# Altium PCB ISL6236A DEMO_PCB_V1I1.PcbDoc
Units mm, origin at the board's own origin, x right, y up, seen from the top; angles counter-clockwise.
Board outline 50 x 50 mm, 6 copper layers (L1, L2, L3, L4, L5, L6), stack 0.816 mm thick; 41 components, 27 nets, 119 pads, 95 vias.
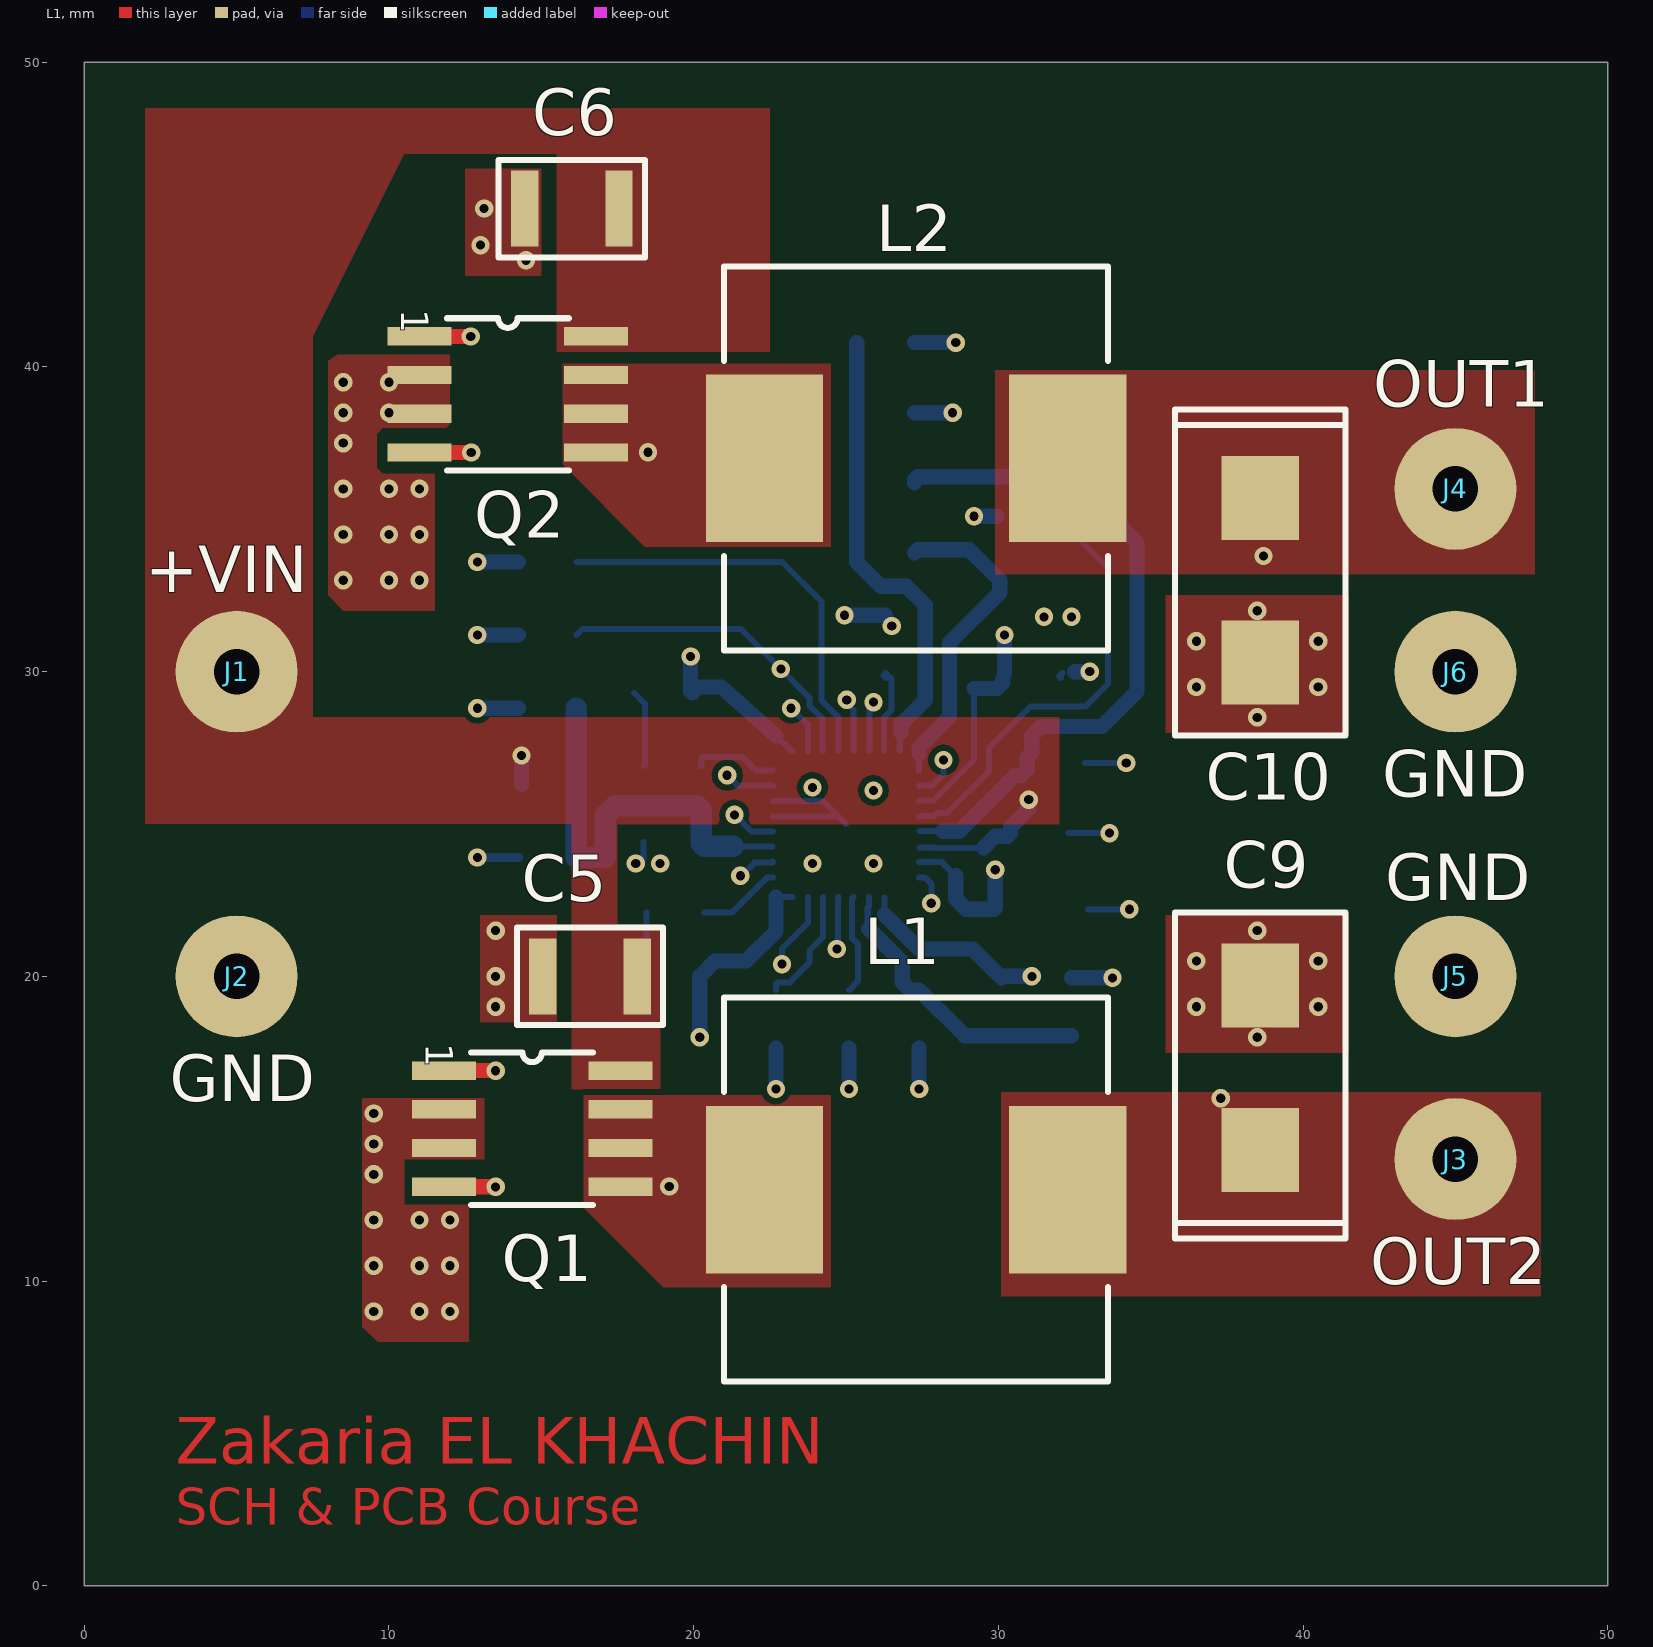
[diagram p0: L1 view]
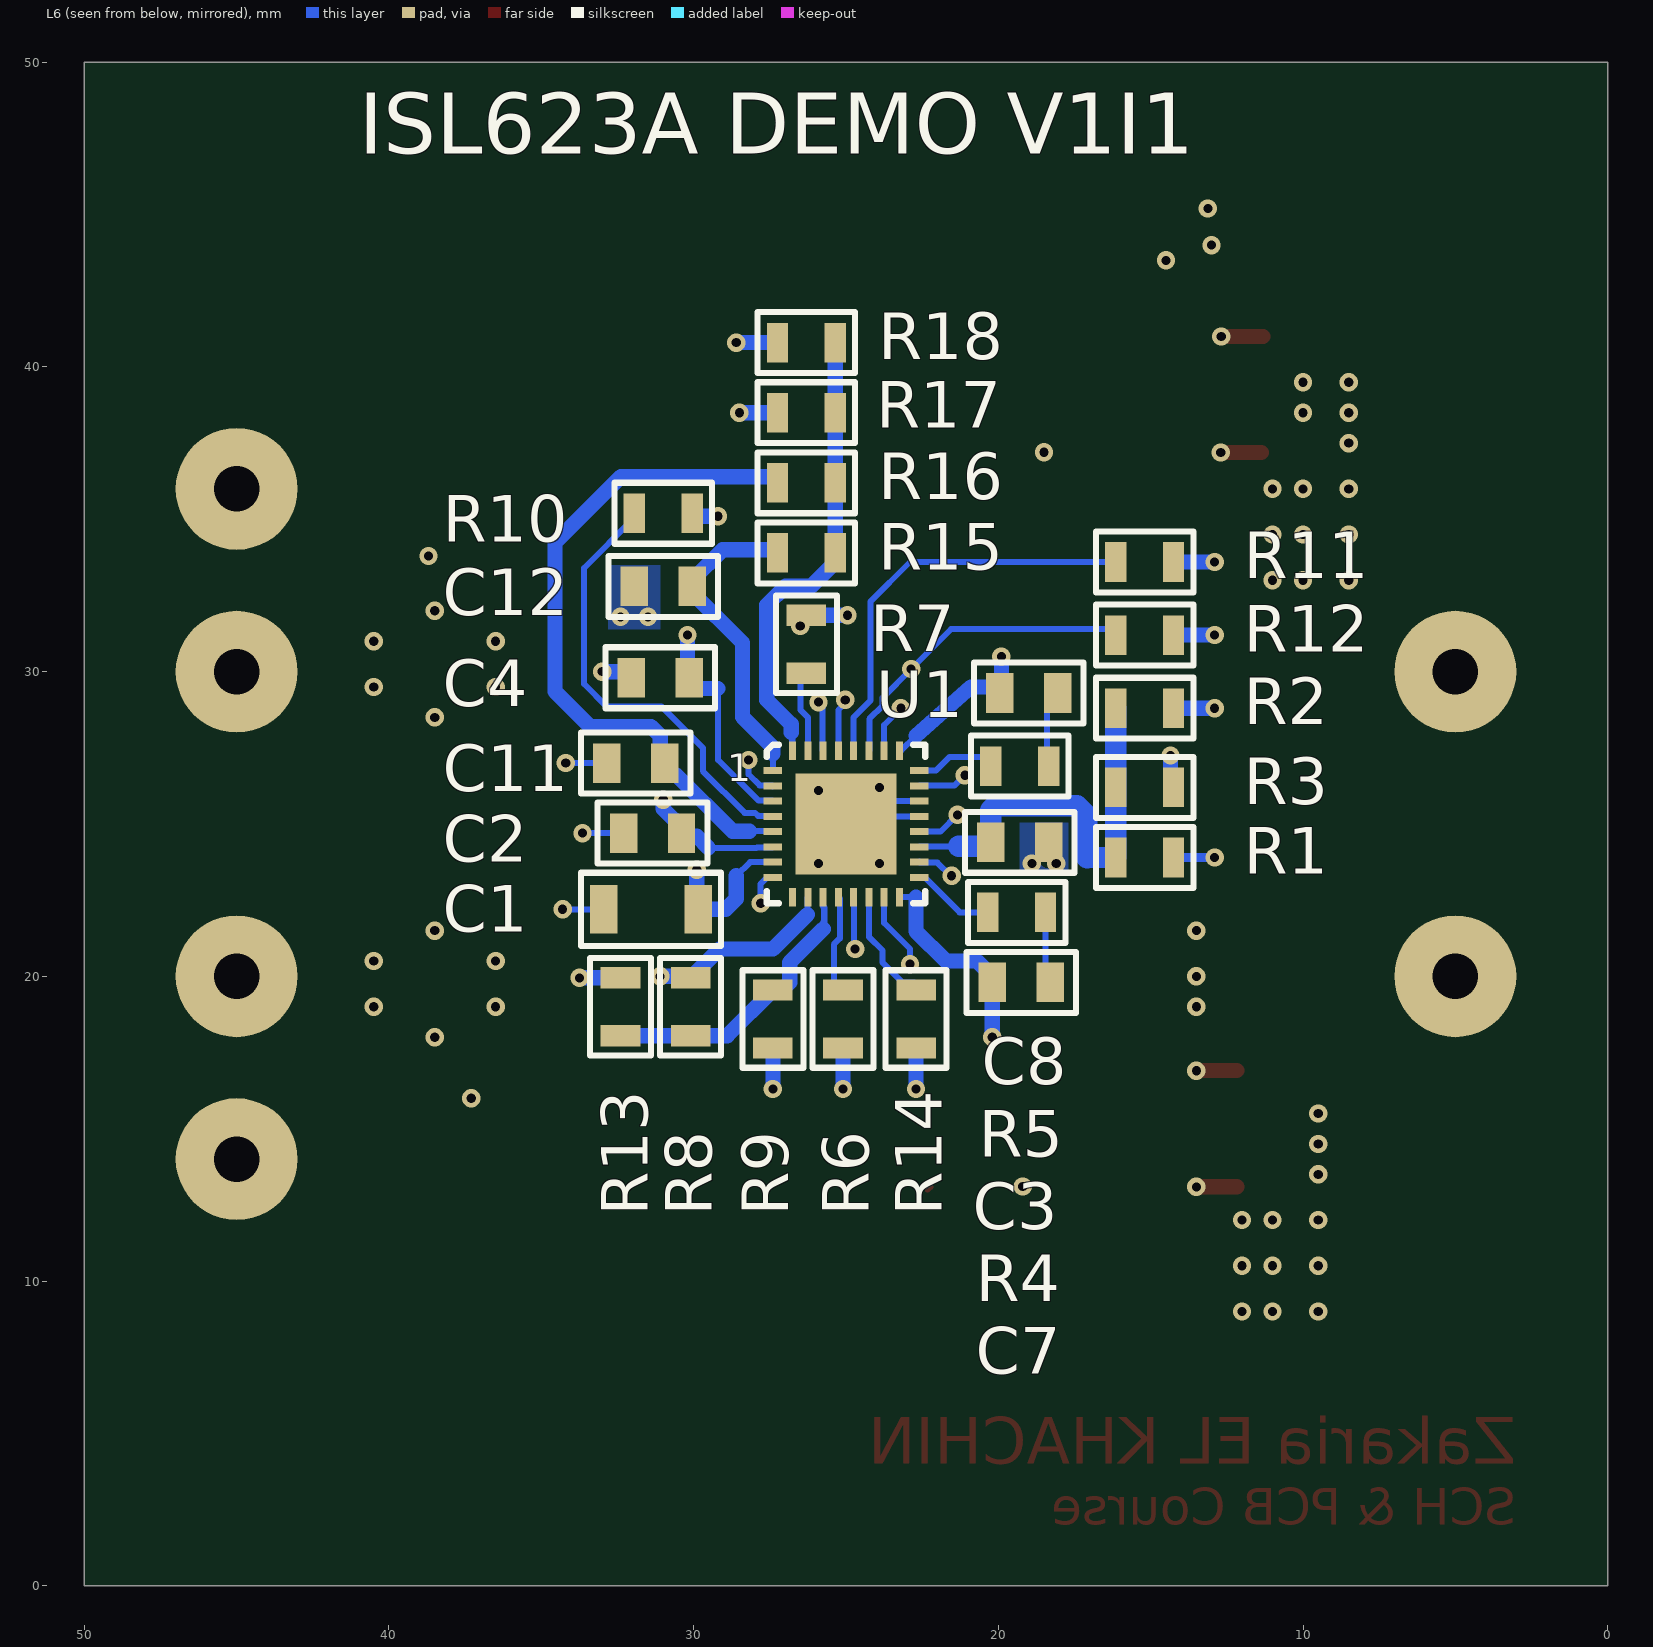
[diagram p1: L6 view, seen from below]
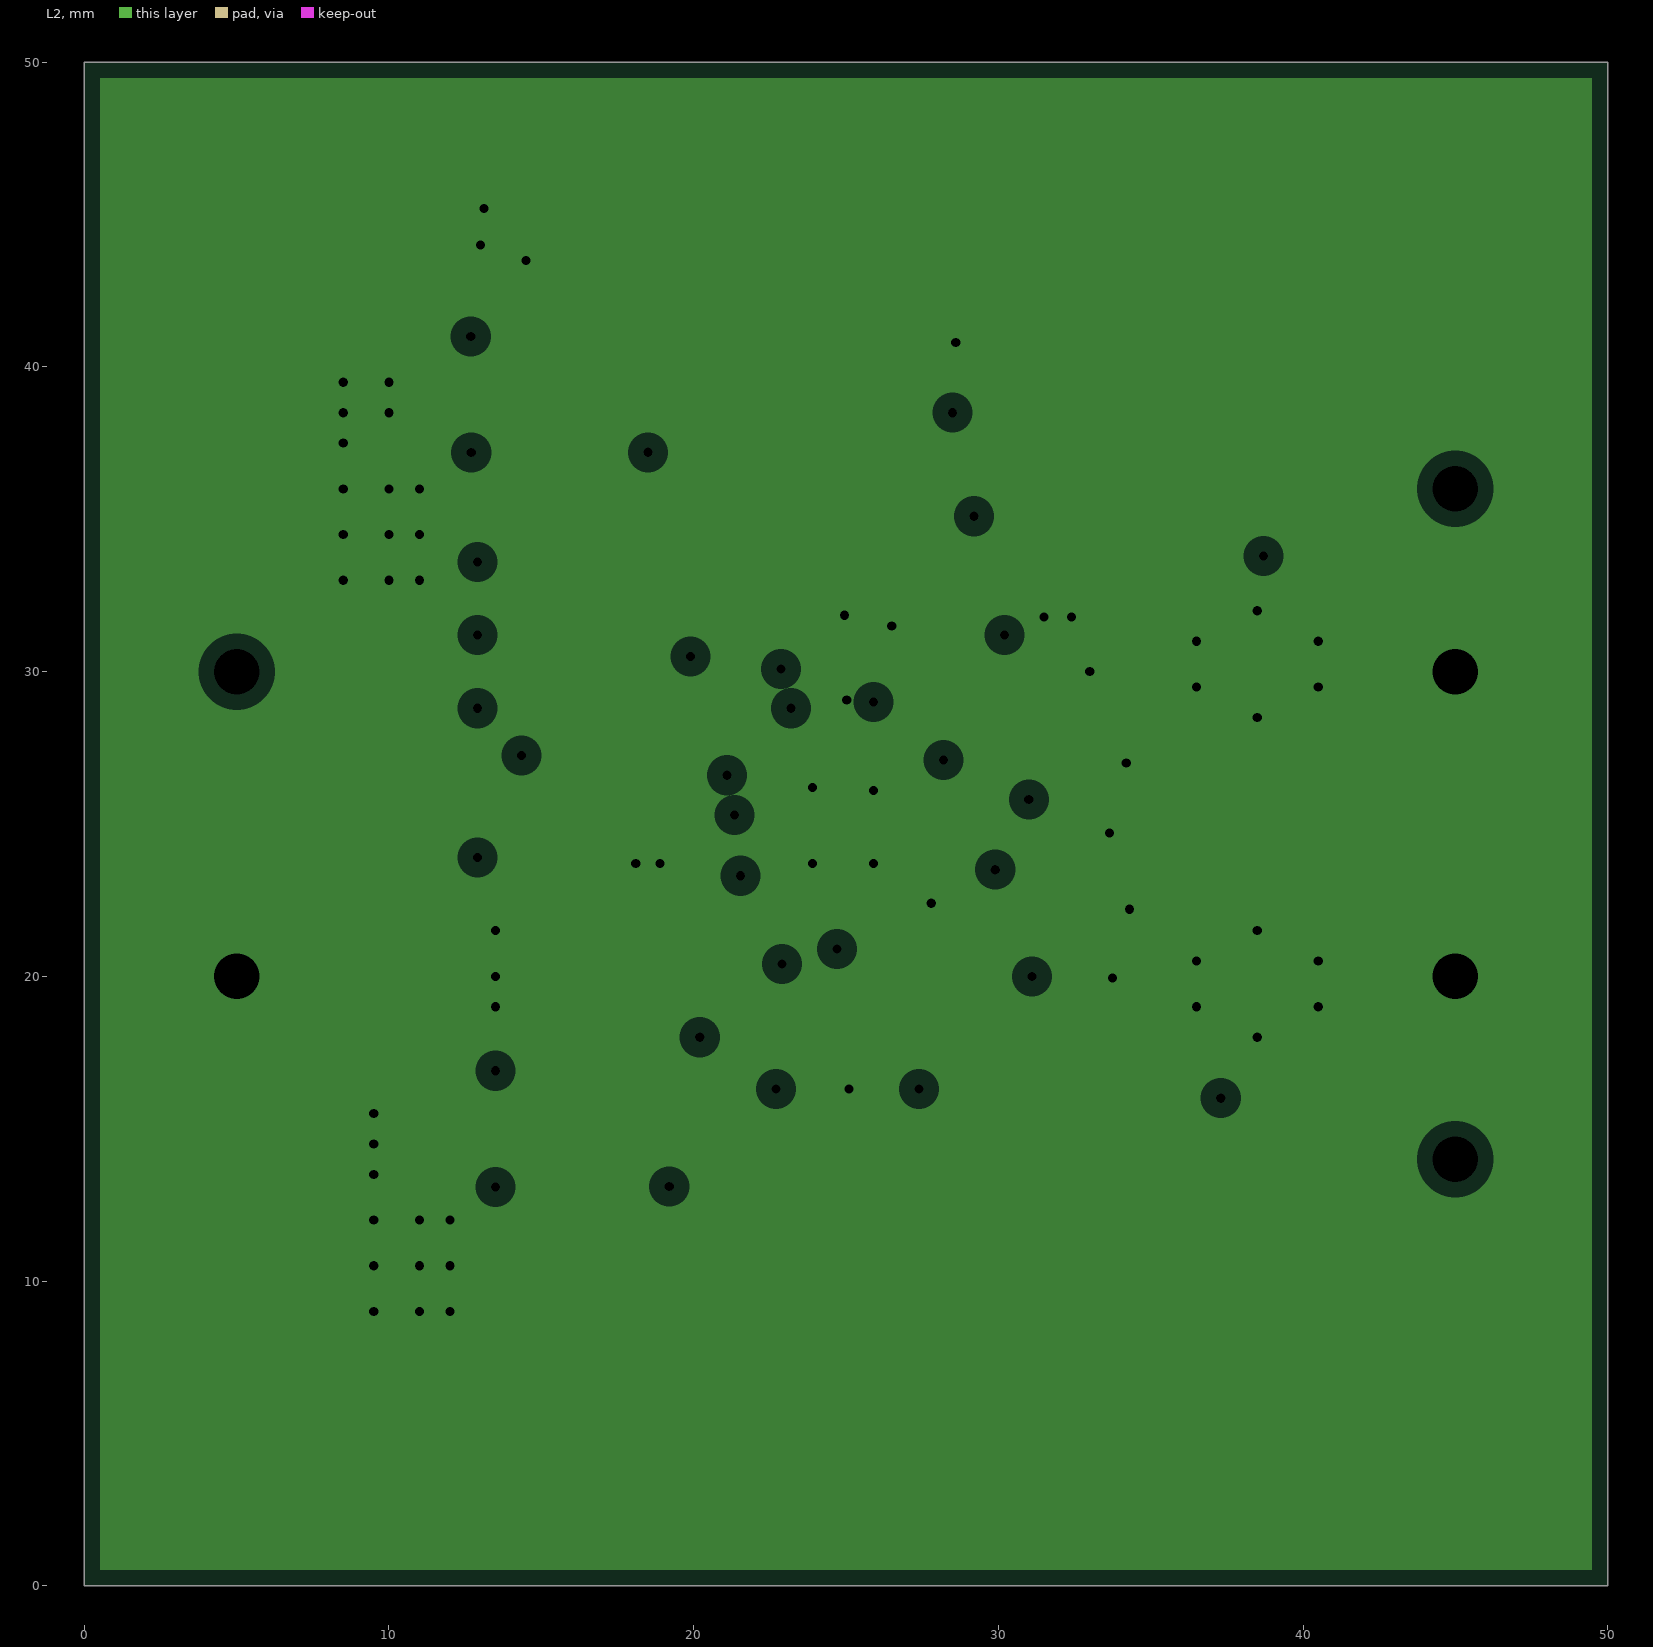
[diagram p2: L2, clearances drawn from the general rule]
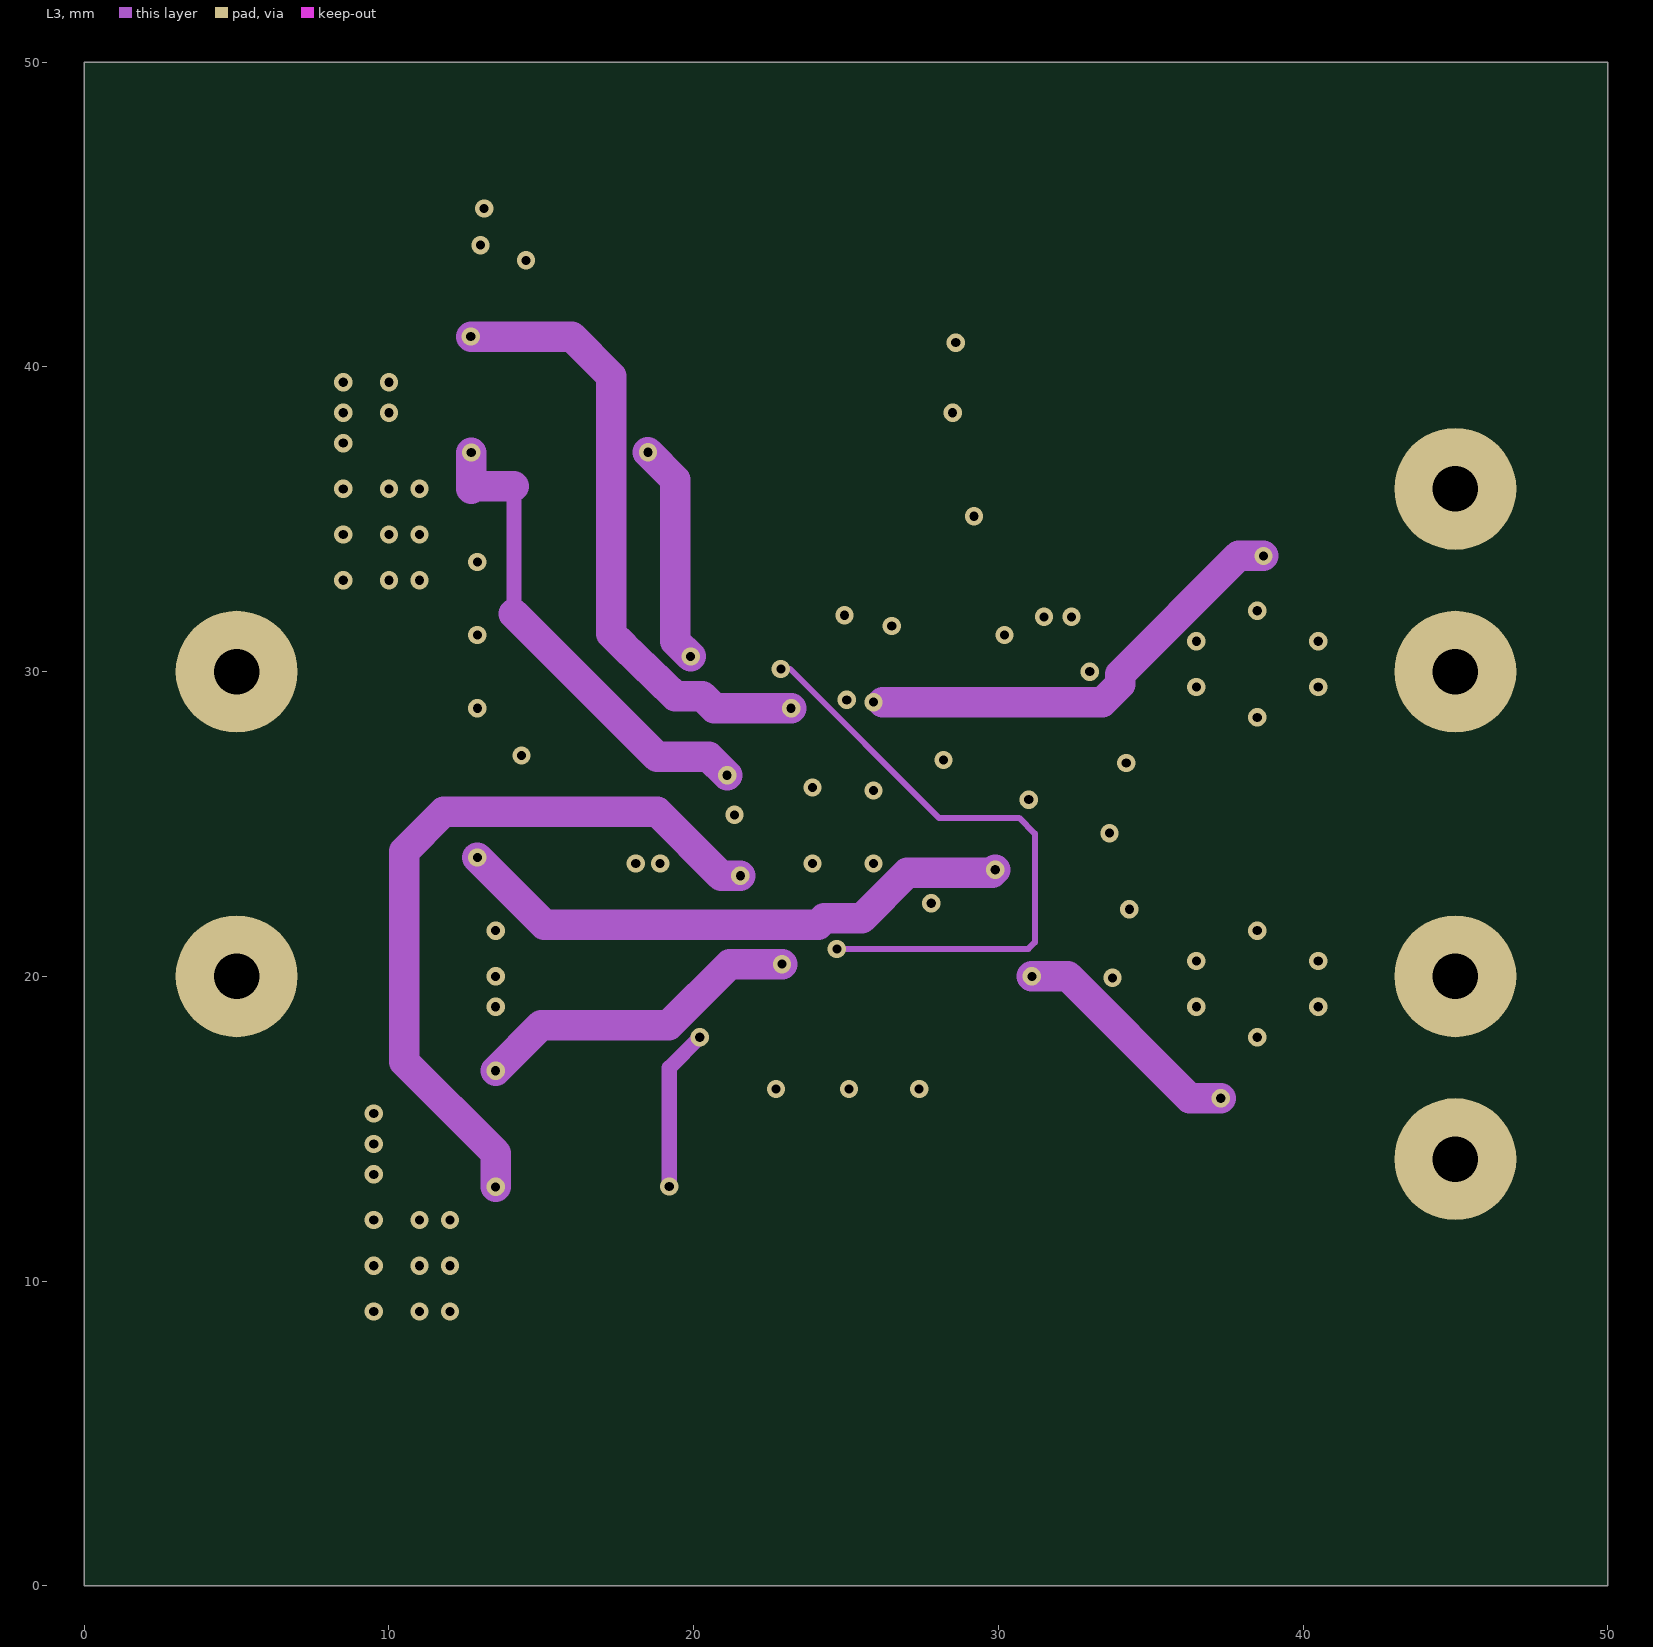
[diagram p3: L3]
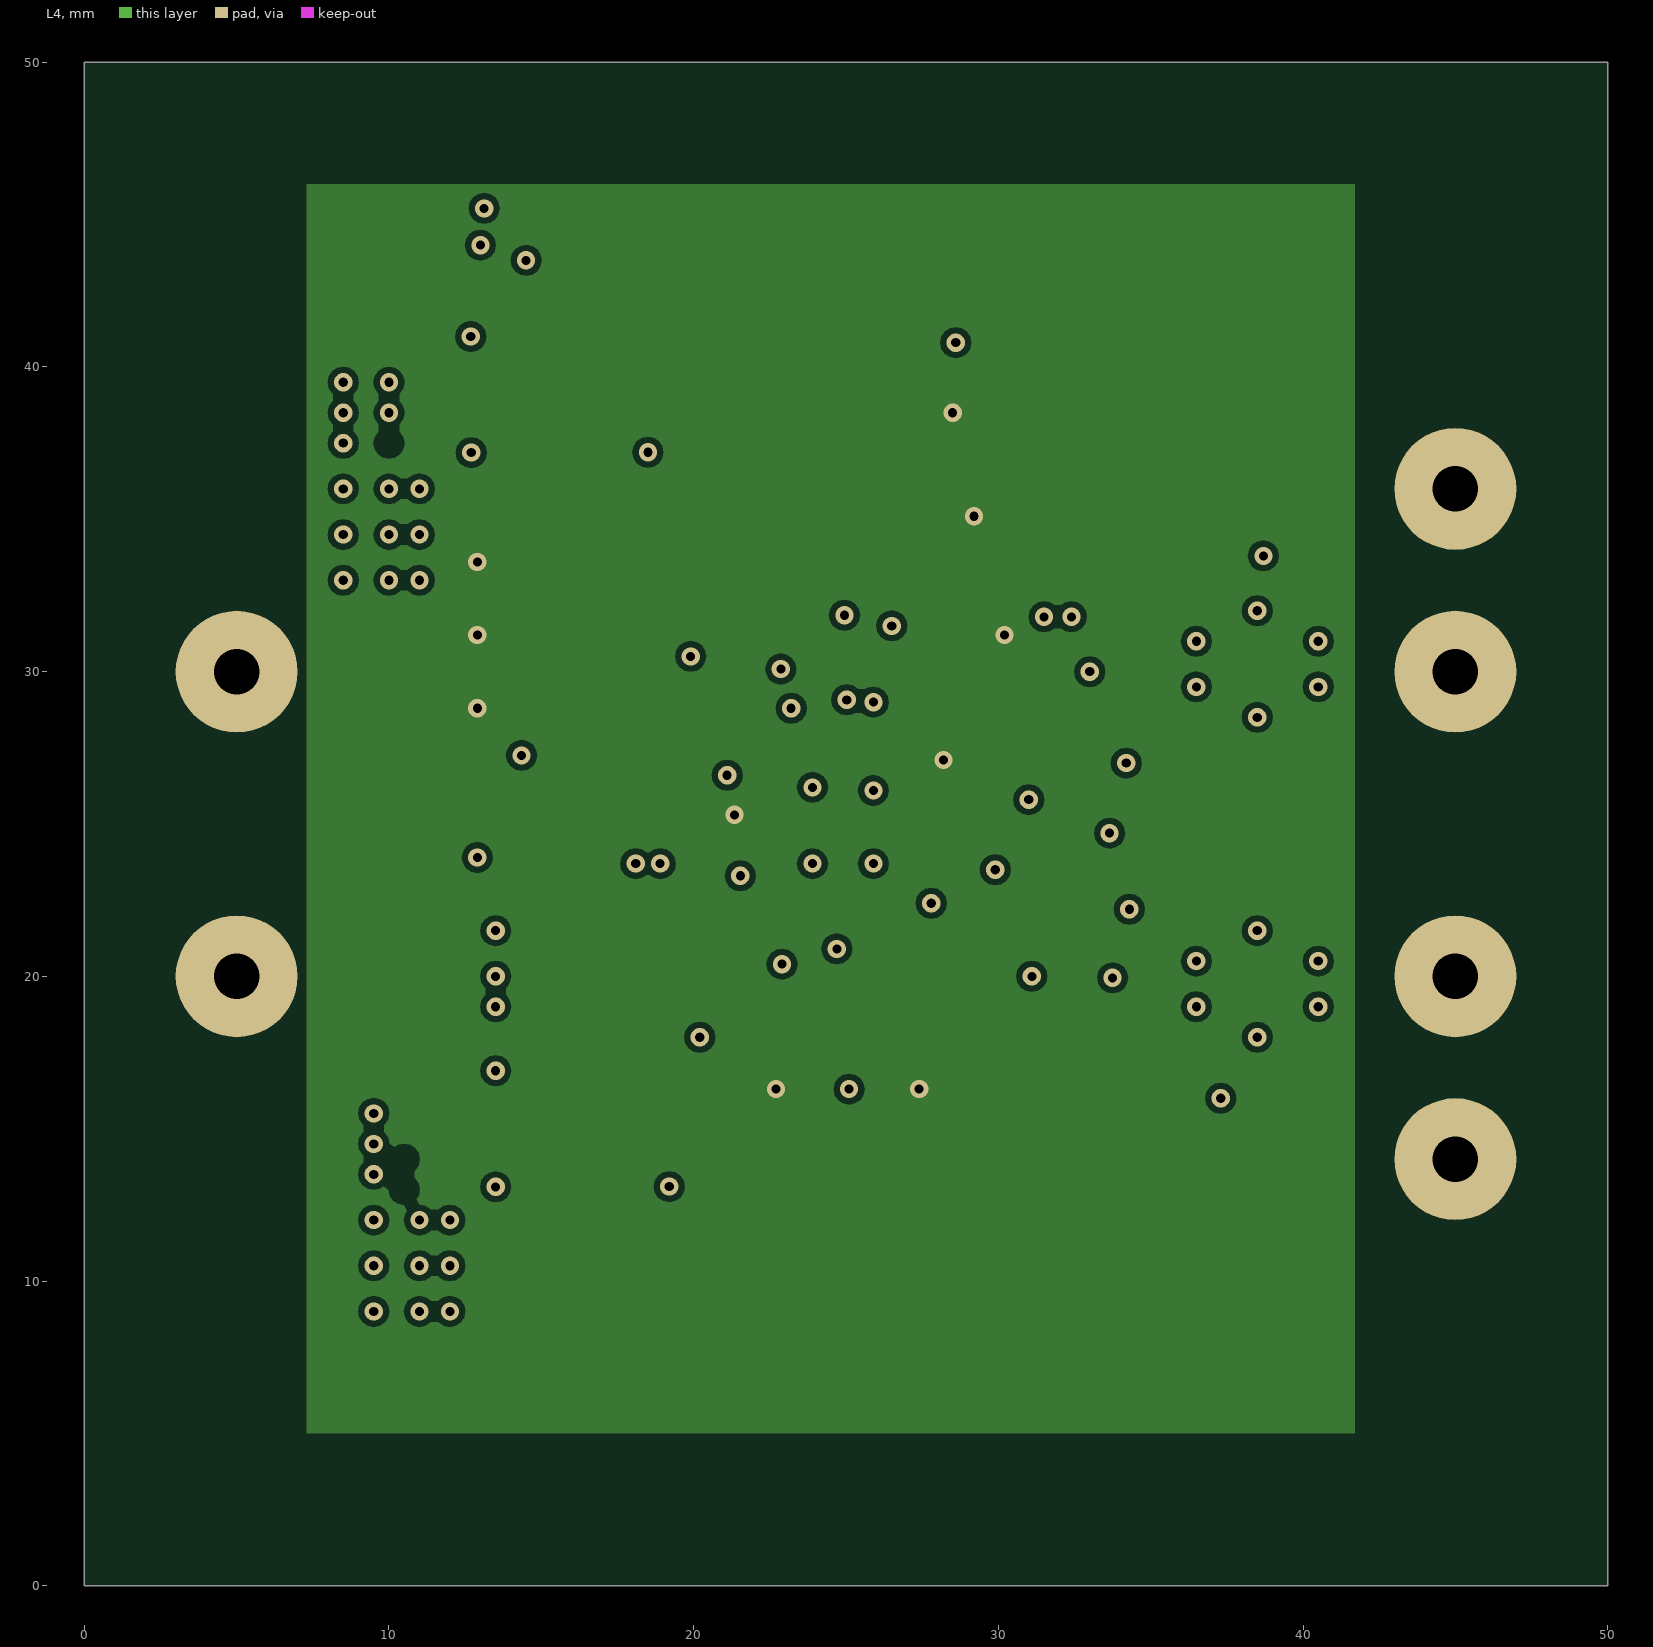
[diagram p4: L4]
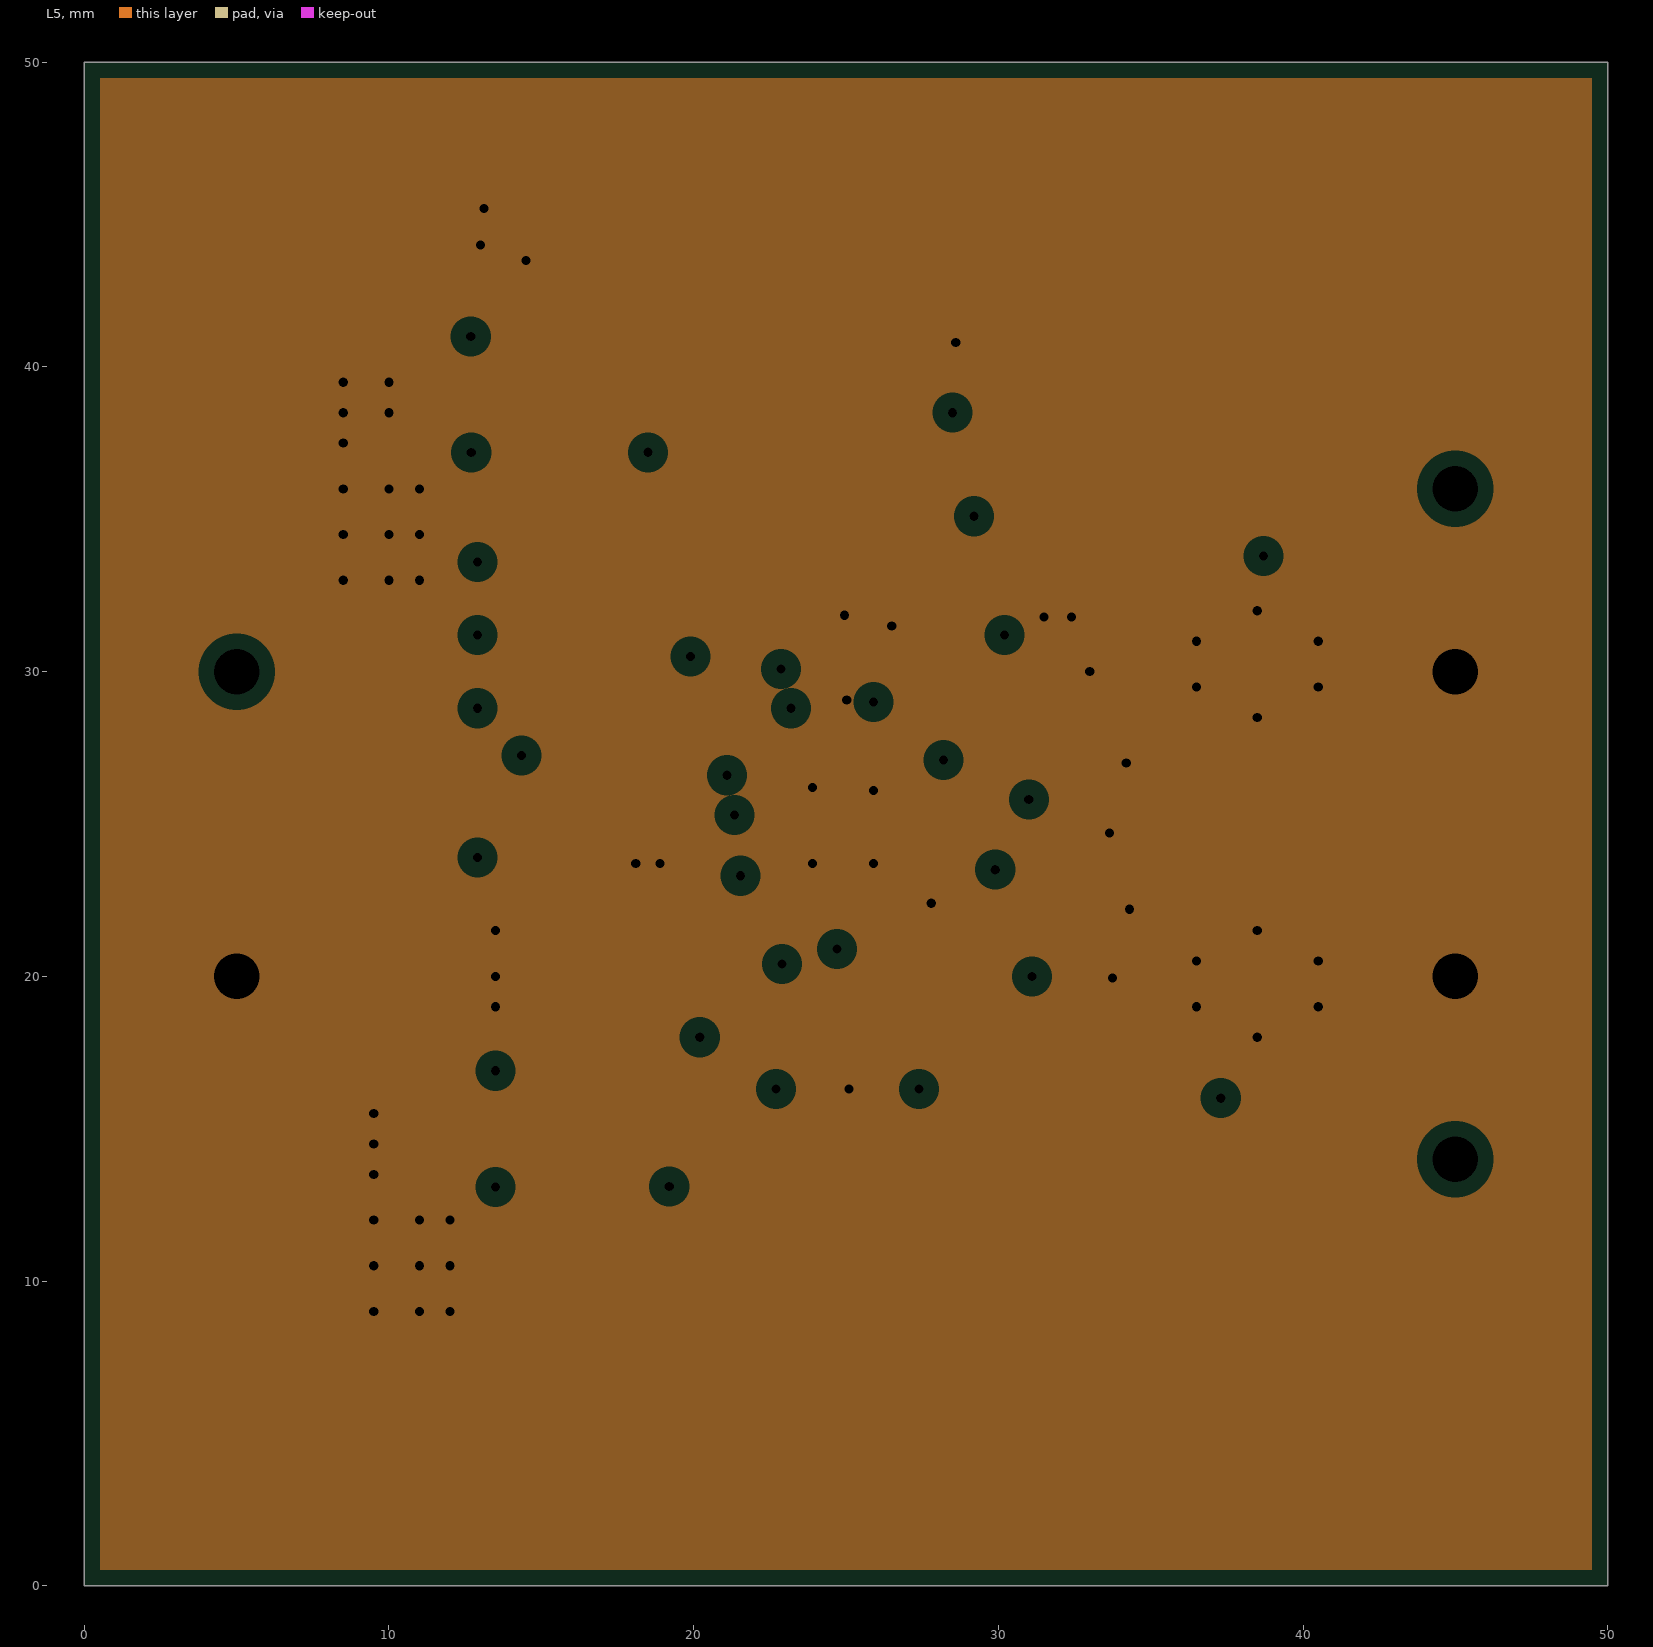
[diagram p5: L5, clearances drawn from the general rule]

## Layer stack, top to bottom
Top Solder: solder mask 0.0102, Solder Resist, Dk 3.5
L1: signal copper 0.0356
Dielectric 2: prepreg 0.0711, PP-006, Dk 4.1
L2: plane copper 0.035, net GND
Dielectric 3: prepreg 0.0711, PP-006, Dk 4.1
L3: signal copper 0.035
Dielectric 4: prepreg 0.0711, PP-006, Dk 4.1
L4: signal copper 0.035
Dielectric 5: prepreg 0.0711, PP-006, Dk 4.1
L5: plane copper 0.035, net GND
Dielectric 1: dielectric 0.32, FR-4, Dk 4.8
L6: signal copper 0.0356
Bottom Solder: solder mask 0.0102, Solder Resist, Dk 3.5

## Board outline
0,0 50,0 50,50 0,50

## Design rules (kind name [scope] priority, off if disabled: settings)
AssemblyTestPointUsage [All] p1: valid=2
Clearance [All] p1: gap=0.2 ignorepadtopadclearanceinfootprint=FALSE
ComponentClearance [All] p1: gap=0.099 collisioncheckmode=3 verticalgap=0.099 showdistances=FALSE
FabricationTestPointUsage [All] p1: valid=1 allowmultiple=FALSE
MinimumSolderMaskSliver [All] p1: minsoldermaskwidth=0.1
PlaneClearance [All] p1: clearance=0.508
PlaneConnect [All] p1: pad.planeconnectstyle=Relief pad.reliefexpansion=0.508 pad.reliefentries=4 pad.reliefconductorwidth=1 pad.reliefairgap=0.5 via.planeconnectstyle=Direct via.reliefexpansion=0.508 via.reliefentries=4 via.reliefconductorwidth=0.254 via.reliefairgap=0.254
PolygonConnect [All] p1: connectstyle=Direct reliefconductorwidth=0.254 reliefentries=4 polygonreliefangle="90 Angle" airgapwidth=0.254
RoutingVias [All] p1: holewidth=0.3 width=0.6 viastyle="Through Hole" minholewidth=0.3 minwidth=0.6 maxholewidth=0.3 maxwidth=0.6
SilkToSolderMaskClearance [IsPad] p1: minsilkscreentomaskgap=0.1 clearancetoexposedcopper=TRUE
SolderMaskExpansion [All] p1: expansion=0.102
Width [All] p1: maxlimit=11 minlimit=0.2 preferedwidth=0.2
23 further rules are at their usual default settings.

## Components (designator, comment, footprint, x,y, rotation, side; value= is the part's Value field where it differs from the comment)
C1 "4.7uF" C1206 31.4,22.2 r0 bottom
C2 "1uF, 50V" C0805 31.35,24.7 r180 bottom
C3 "1uF, 50V" C0805 19.3,24.4 r0 bottom
C4 "1uF, 50V" C0805 31.1,29.8 r180 bottom
C5 "10uF" C1210 16.6,20 r0 top
C6 "10uF" C1210 16,45.2 r180 top
C7 "100nF" C0805 19.25,19.8 r180 bottom
C8 "220nF" C0805 19,29.3 r0 bottom
C9 "330uF" 7343-43 38.6,17 r90 top
C10 "330uF" 7343-43 38.6,33 r270 top
C11 "10nF" C0805 31.9,27 r0 bottom
C12 "100nF" C0805 31,32.8 r0 bottom
J1 "4MMx1MM5" PAD_WITH_HOLE_4MMx1MM5 5,30 r0 top
J2 "4MMx1MM5" PAD_WITH_HOLE_4MMx1MM5 5,20 r0 top
J3 "4MMx1MM5" PAD_WITH_HOLE_4MMx1MM5 45,14 r0 top
J4 "4MMx1MM5" PAD_WITH_HOLE_4MMx1MM5 45,36 r0 top
J5 "4MMx1MM5" PAD_WITH_HOLE_4MMx1MM5 45,20 r0 top
J6 "4MMx1MM5" PAD_WITH_HOLE_4MMx1MM5 45,30 r0 top
L1 "3u3, DR125-3R3-R" DR125 27.3,13 r180 top
L2 "2u2, DR125-2R2-R" DR125 27.3,37 r0 top
Q1 "SI4816BDY-T1-E3" SO-8 14.7,15 r0 top
Q2 "SI4816BDY-T1-E3" SO-8 13.9,39.1 r0 top
R1 "0R" R0805 15.2,23.9 r180 bottom
R2 "10R" R0805 15.2,28.8 r180 bottom
R3 "0R" R0805 15.2,26.2 r0 bottom
R4 "1R" R0805 19.4,22.1 r0 bottom
R5 "1R" R0805 19.3,26.9 r180 bottom
R6 "200k" R0805 25.1,18.6 r90 bottom
R7 "200k" R0805 26.3,30.9 r90 bottom
R8 "DNF" R0805 30.1,19 r90 bottom
R9 "0R" R0805 27.4,18.6 r270 bottom
R10 "10k" R0805 31,35.2 r180 bottom
R11 "200k" R0805 15.2,33.6 r180 bottom
R12 "200k" R0805 15.2,31.2 r180 bottom
R13 "DNF" R0805 32.4,19 r270 bottom
R14 "10k" R0805 22.7,18.6 r270 bottom
R15 "DNF" R0805 26.3,33.9 r180 bottom
R16 "0R" R0805 26.3,36.2 r0 bottom
R17 "DNF" R0805 26.3,38.5 r180 bottom
R18 "DNF" R0805 26.3,40.8 r0 bottom
U1 "ISL6236AIRZ" L32.5x5B 25,25 r180 bottom

## Footprints (in the part's own frame and the unit in brackets; to place one, negate y for a bottom-side part, rotate by r counter-clockwise, add the part's x,y. Pads: shape width x height; smd on the part's side, far side on the other; paste and mask are expansions set on the pad)
7343-43 [mm]
  rect 2.75x2.55 smd: 1(-2.7,0) 2(2.7,0)
  silkscreen extent -5.6,-2.8 5.1,2.8
C0805 [mm]
  rect 0.9x1.3 smd: 1(-0.95,0) 2(0.95,0)
  silkscreen extent -1.8,-1 1.8,1
C1206 [mm]
  rect 0.9x1.6 smd: 1(-1.55,0) 2(1.55,0)
  silkscreen extent -2.3,-1.2 2.3,1.2
C1210 [mm]
  rect 0.9x2.5 smd: 1(-1.55,0) 2(1.55,0)
  silkscreen extent -2.4,-1.6 2.4,1.6
DR125 [mm]
  rect 3.85x5.5 smd: 1(-4.975,0) 2(4.975,0)
  silkscreen extent -6.3,-6.3 6.3,6.3
L32.5x5B [mm]
  rect 0.6x0.23 smd mask+0.051: 1(-2.4,1.75) 2(-2.4,1.25) 3(-2.4,0.75) 4(-2.4,0.25) 5(-2.4,-0.25) 6(-2.4,-0.75) 7(-2.4,-1.25) 8(-2.4,-1.75) 17(2.4,-1.75) 18(2.4,-1.25) 19(2.4,-0.75) 20(2.4,-0.25) 21(2.4,0.25) 22(2.4,0.75) 23(2.4,1.25) 24(2.4,1.75)
  rect 0.23x0.6 smd mask+0.051: 9(-1.75,-2.4) 10(-1.25,-2.4) 11(-0.75,-2.4) 12(-0.25,-2.4) 13(0.25,-2.4) 14(0.75,-2.4) 15(1.25,-2.4) 16(1.75,-2.4) 25(1.75,2.4) 26(1.25,2.4) 27(0.75,2.4) 28(0.25,2.4) 29(-0.25,2.4) 30(-0.75,2.4) 31(-1.25,2.4) 32(-1.75,2.4)
  rect 3.3x3.3 smd mask+0.051: 33(0,0)
  silkscreen extent -2.6,-2.6 2.6,2.6
PAD_WITH_HOLE_4MMx1MM5 [mm]
  round 4 hole 1.5: 1(0,0)
R0805 [mm]
  rect 0.7x1.3 smd: 1(-0.95,0) 2(0.95,0)
  silkscreen extent -1.6,-1 1.6,1
SO-8 [mm]
  rect 2.1x0.6 smd: 1(-2.9,1.905) 2(-2.9,0.635) 3(-2.9,-0.635) 4(-2.9,-1.905) 5(2.9,-1.905) 6(2.9,-0.635) 7(2.9,0.635) 8(2.9,1.905)
  silkscreen extent -2,-2.5 2,2.5

## Part data
C1: library part C3216X5R1H475K160AB, "CAP CER 4.7UF 50V X5R 1206", Case/Package=1206, Case Code (Metric)=3216, Dielectric=X5R, Dielectric Material=Ceramic, Manufacturer 1=TDK, Max Operating Temperature=85°C, Min Operating Temperature=-55°C, Package Quantity=1, Supplier Part Number 1=445-5994-1-ND, Tolerance=10%, Voltage Rating=50V, Capacitance=4.7uF, Case Code (Imperial)=1206, ComponentLink1Description=https://datasheet.ciiva.com/24216/c3216x5r1h475k160ab-265269-24216325.pdf?src-supplier=Mouser, ComponentLink1URL=https://datasheet.ciiva.com/24216/c3216x5r1h475k160ab-265269-24216325.pdf?src-supplier=Mouser, ComponentLink2Description=https://datasheet.ciiva.com/6286/tdkmlcccaprange-6286230.pdf?src-supplier=Digi-Key, ComponentLink2URL=https://datasheet.ciiva.com/6286/tdkmlcccaprange-6286230.pdf?src-supplier=Digi-Key, ComponentLink3Description=https://datasheet.ciiva.com/6286/tdkmlcccaprange-6286233.pdf?src-supplier=Digi-Key, ComponentLink3URL=https://datasheet.ciiva.com/6286/tdkmlcccaprange-6286233.pdf?src-supplier=Digi-Key, ComponentLink4Description=https://datasheet.ciiva.com/6286/tdkmlcccaprange-6286236.pdf?src-supplier=Digi-Key, ComponentLink4URL=https://datasheet.ciiva.com/6286/tdkmlcccaprange-6286236.pdf?src-supplier=Digi-Key, Composition=Ceramic, Depth=1.6mm, Height=1.6mm, Lead Free="Lead Free", Length=3.2mm, Manufacturer Part Number 1=C3216X5R1H475K160AB, Mount="Surface Mount", Packaging="Tape and Reel", Pricing 1="1=0.90000, 10=0.66400, 100=0.45540, 500=0.36052, 1000=0.30360 (USD)", RoHS=Yes, Stock 1=12830, Supplier 1=Digi-Key, Termination=SMD/SMT, Thickness=0.071inch, Voltage Rating (DC)=50V, Weight=0.000571oz, Width=1.6mm
C2 C3 C4: library part C0805C105K5RACTU, "Cap Ceramic 1uF 50V X7R 10% Pad SMD 0805 125°C T/R", Capacitance=1uF, Case/Package=0805, Case Code (Metric)=2012, Dielectric=X7R, Dielectric Material=Ceramic, Manufacturer 1=KEMET, Max Operating Temperature=125°C, Min Operating Temperature=-55°C, Package Quantity=1, Supplier Part Number 1=399-7409-1-ND, Tolerance=10%, Voltage=50V, Case Code (Imperial)=0805, ComponentLink1Description=https://datasheet.ciiva.com/7842/1732744-7842192.pdf?src-supplier=Element14, ComponentLink1URL=https://datasheet.ciiva.com/7842/1732744-7842192.pdf?src-supplier=Element14, ComponentLink2Description=https://datasheet.ciiva.com/5408/kem-c1002-x7r-smd-5408569.pdf?src-supplier=Mouser, ComponentLink2URL=https://datasheet.ciiva.com/5408/kem-c1002-x7r-smd-5408569.pdf?src-supplier=Mouser, ComponentLink3Description=https://datasheet.ciiva.com/22700/1851736-22700523.pdf?src-supplier=Element14, ComponentLink3URL=https://datasheet.ciiva.com/22700/1851736-22700523.pdf?src-supplier=Element14, Contact Plating=Tin,Matte, Depth=1.25mm, Height=1.25mm, Length=2mm, Manufacturer Part Number 1=C0805C105K5RACTU, Mount="Surface Mount,PCB", Packaging="Tape and Reel", Pricing 1="1=0.40000, 10=0.27700, 100=0.16620, 500=0.12466, 1000=0.10527 (USD)", REACH SVHC="No SVHC", RoHS=Yes, Stock 1=0, Supplier 1=Digi-Key, Termination=SMD/SMT, Thickness=0.055inch, Voltage Rating=50V, Voltage Rating (DC)=50V, Width=0.049inch
C5 C6: library part C1210C106K6PACTU, "KEMET - C1210C106K6PACTU - CAP, MLCC, X5R, 10UF, 35V, 1210", Case/Package=1210, Case Code (Metric)=3225, Dielectric=X5R, Dielectric Material=Ceramic, Manufacturer 1=KEMET, Max Operating Temperature=85°C, Min Operating Temperature=-55°C, Supplier Part Number 1=399-12070-1-ND, Tolerance=10%, Voltage=35V, Capacitance=10uF, Case Code (Imperial)=1210, ComponentLink1Description=http://www.alliedelec.com/m/d/f3c02ddb98afa3dd1adcb801109671e9.pdf?src-supplier=Allied+Electronics, ComponentLink1URL=http://www.alliedelec.com/m/d/f3c02ddb98afa3dd1adcb801109671e9.pdf?src-supplier=Allied+Electronics, ComponentLink2Description=http://www.farnell.com/datasheets/2741192.pdf?src-supplier=Farnell, ComponentLink2URL=http://www.farnell.com/datasheets/2741192.pdf?src-supplier=Farnell, ComponentLink3Description=https://api.kemet.com/component-edge/download/datasheet/C1210C106K6PAC7800.pdf?src-supplier=Digi-Key, ComponentLink3URL=https://api.kemet.com/component-edge/download/datasheet/C1210C106K6PAC7800.pdf?src-supplier=Digi-Key, ComponentLink4Description=http://www.kemet.com/docfinder?Partnumber=C1210C106K6PAC7800&src-supplier=Digi-Key, ComponentLink4URL=http://www.kemet.com/docfinder?Partnumber=C1210C106K6PAC7800&src-supplier=Digi-Key, ComponentLink5Description=http://www.farnell.com/datasheets/2741192.pdf?src-supplier=Newark, ComponentLink5URL=http://www.farnell.com/datasheets/2741192.pdf?src-supplier=Newark, Depth=2.5mm, Dissipation Factor=2.5%, Height=1.9mm, Lead Free="Lead Free", Length=0.126inch, Manufacturer Part Number 1=C1210C106K6PACTU, Mount="Surface Mount", Packaging="Tape and Reel", Pricing 1="1=0.82000, 10=0.60300, 100=0.41380, 500=0.32760, 1000=0.27588 (USD)", RoHS=Yes, Stock 1=52713, Supplier 1=Digi-Key, Termination=Solder, Thickness=0.083inch, Voltage Rating=35V, Voltage Rating (DC)=35V, Width=0.098inch
C7 C12: library part C0805C104K5RACTU, "Cap Ceramic 0.1uF 50V X7R 10% SMD 2.0 x 1.2 mm 125 C Paper T/R", Case/Package=0805, Case Code (Metric)=2012, Dielectric=X7R, Dielectric Material=Ceramic, Manufacturer 1=KEMET, Max Operating Temperature=125°C, Min Operating Temperature=-55°C, Package Quantity=4000, Supplier Part Number 1=399-1170-6-ND, Tolerance=10%, Voltage=500V, Voltage Rating=50V, Capacitance=100nF, Case Code (Imperial)=0805, ComponentLink1Description=https://datasheet.ciiva.com/14589/70095383-14589048.pdf?src-supplier=Allied+Electronics, ComponentLink1URL=https://datasheet.ciiva.com/14589/70095383-14589048.pdf?src-supplier=Allied+Electronics, ComponentLink2Description=https://datasheet.ciiva.com/28682/1851736-28682232.pdf?src-supplier=Element14, ComponentLink2URL=https://datasheet.ciiva.com/28682/1851736-28682232.pdf?src-supplier=Element14, ComponentLink3Description=https://datasheet.ciiva.com/32431/slceramic-chip-condensers-e-32431755.pdf?src-supplier=Distrelec, ComponentLink3URL=https://datasheet.ciiva.com/32431/slceramic-chip-condensers-e-32431755.pdf?src-supplier=Distrelec, ComponentLink4Description=https://datasheet.ciiva.com/18410/70095383-18410815.pdf?src-supplier=Allied+Electronics, ComponentLink4URL=https://datasheet.ciiva.com/18410/70095383-18410815.pdf?src-supplier=Allied+Electronics, Contact Plating=Tin,Matte, Depth=1.25mm, Height=0.9mm, Lead Pitch=0.75mm, Length=2mm, Manufacturer Part Number 1=C0805C104K5RACTU, Mount="Surface Mount,PCB", Number of Pins=2, Packaging="Tape and Reel", Pricing 1="1=0.17000, 10=0.12100, 100=0.05670, 500=0.03976, 1000=0.03291 (USD)", Radiation Hardening=No, REACH SVHC="No SVHC", RoHS=Yes, Stock 1=146225, Supplier 1=Digi-Key, Termination=SMD/SMT, Thickness=0.035inch, Voltage Rating (DC)=50V, Width=1.2mm
C8: library part C0805C224K5RACTU, "CAP CER 0.22UF 50V X7R 0805", Case/Package=0805, Case Code (Metric)=2012, Dielectric=X7R, Dielectric Material=Ceramic, Manufacturer 1=KEMET, Max Operating Temperature=125°C, Min Operating Temperature=-55°C, Package Quantity=1, Supplier Part Number 1=399-3491-1-ND, Tolerance=10%, Voltage=50V, Capacitance=220nF, Case Code (Imperial)=0805, ComponentLink1Description=https://datasheet.ciiva.com/7842/kem-c1002-x7r-smd-7842582.pdf?src-supplier=Element14, ComponentLink1URL=https://datasheet.ciiva.com/7842/kem-c1002-x7r-smd-7842582.pdf?src-supplier=Element14, ComponentLink2Description=https://datasheet.ciiva.com/18193/getdatasheetpartid-304413-18193686.pdf?src-supplier=Verical, ComponentLink2URL=https://datasheet.ciiva.com/18193/getdatasheetpartid-304413-18193686.pdf?src-supplier=Verical, ComponentLink3Description=https://datasheet.ciiva.com/28682/1851736-28682316.pdf?src-supplier=Element14, ComponentLink3URL=https://datasheet.ciiva.com/28682/1851736-28682316.pdf?src-supplier=Element14, Depth=1.25mm, Dissipation Factor=2.5%, Height=1.1mm, Lead Pitch=0.75mm, Length=2mm, Manufacturer Part Number 1=C0805C224K5RACTU, Mount="Surface Mount,PCB", Packaging="Tape and Reel", Pricing 1="1=0.20000, 10=0.13900, 100=0.06550, 500=0.04592, 1000=0.03802 (USD)", Radiation Hardening=No, REACH SVHC="No SVHC", RoHS=Yes, Stock 1=1706361, Supplier 1=Digi-Key, Termination=SMD/SMT, Thickness=0.055inch, Voltage Rating=50V, Voltage Rating (DC)=50V, Width=0.049inch
C9 C10: library part T530X337M010ATE004, "Tantalum Capacitors - Polymer SMD 330uF 10volts 20%", Case/Package=2917, Case Code (Metric)=7343, ESR (Equivalent Series Resistance)=4mR, Leakage Current=330uA, Manufacturer 1=KEMET, Max Operating Temperature=125°C, Min Operating Temperature=-55°C, Package Quantity=500, Ripple Current=8.2A, Supplier Part Number 1=399-10378-1-ND, Tolerance=20%, Voltage=10V, Capacitance=330uF, Case Code (Imperial)=2917, ComponentLink1Description=https://datasheet.ciiva.com/11794/0900766b80deaa91-11794477.pdf?src-supplier=RSComponents, ComponentLink1URL=https://datasheet.ciiva.com/11794/0900766b80deaa91-11794477.pdf?src-supplier=RSComponents, ComponentLink2Description=https://datasheet.ciiva.com/14593/70096008-14593753.pdf?src-supplier=Allied+Electronics, ComponentLink2URL=https://datasheet.ciiva.com/14593/70096008-14593753.pdf?src-supplier=Allied+Electronics, Depth=4.3mm, Dissipation Factor=8%, Features="General Purpose", Height=4mm, Height - Seated (Max)=0.169inch, Length=7.3mm, Life (Hours)=2000Hour, Manufacturer Part Number 1=T530X337M010ATE004, Mount="Surface Mount,PCB", Packaging="Tape and Reel", Polarity=Polar, Pricing 1="1=6.86000, 10=6.09500, 100=4.87600 (USD)", REACH SVHC="No SVHC", RoHS=Yes, Stock 1=3288, Supplier 1=Digi-Key, Termination=SMD/SMT, Voltage Rating=10V, Voltage Rating (DC)=10V, Width=4.3mm
C11: library part C0805F103K5RACTU, "CAP CER 10000PF 50V X7R 0805", Case/Package=0805, Case Code (Metric)=2012, Dielectric=X7R, Dielectric Material=Ceramic, Manufacturer 1=KEMET, Max Operating Temperature=125°C, Min Operating Temperature=-55°C, Package Quantity=4000, Supplier Part Number 1=399-5107-1-ND, Tolerance=10%, Voltage=50V, Capacitance=10nF, Case Code (Imperial)=0805, ComponentLink1Description=https://datasheet.ciiva.com/146/docfinderpartnumber-c0805f103k5ractu-146278.pdf?src-supplier=Digi-Key, ComponentLink1URL=https://datasheet.ciiva.com/146/docfinderpartnumber-c0805f103k5ractu-146278.pdf?src-supplier=Digi-Key, ComponentLink2Description=https://datasheet.ciiva.com/7842/48829-7842407.pdf?src-supplier=Element14, ComponentLink2URL=https://datasheet.ciiva.com/7842/48829-7842407.pdf?src-supplier=Element14, ComponentLink3Description=https://datasheet.ciiva.com/7842/48829-7842408.pdf?src-supplier=Element14, ComponentLink3URL=https://datasheet.ciiva.com/7842/48829-7842408.pdf?src-supplier=Element14, Depth=1.25mm, Height=0.9mm, Lead Pitch=0.75mm, Length=2mm, Manufacturer Part Number 1=C0805F103K5RACTU, Mount="Surface Mount", Number of Pins=2, Packaging="Tape and Reel", Pricing 1="1=0.34000, 10=0.23600, 100=0.14170, 500=0.10624, 1000=0.08972 (USD)", Radiation Hardening=No, REACH SVHC="No SVHC", RoHS=Yes, Stock 1=104000, Supplier 1=Digi-Key, Termination=SMD/SMT, Thickness=0.039inch, Voltage Rating=50V, Voltage Rating (DC)=50V, Width=1.25mm
J1 J2 J3 J4 J5 J6: library part PAD_WITH_HOLE_4MMx1MM5, "PAD_WITH_HOLE_4MMx1MM5"
L1: library part DR125-3R3-R, "FIXED IND 3.3UH 9.26A 6.3 MOHM", Case/Package=Nonstandard, Current Rating=9.26A, DC Resistance (DCR)=6.3mR, Inductance=3.3uH, Inductance Tolerance=20%, Manufacturer 1="Eaton Cooper", Max Operating Temperature=125°C, Min Operating Temperature=-40°C, Package Quantity=600, Saturation Current=12.7A, Self Resonant Frequency=100kHz, Supplier Part Number 1=513-1529-1-ND, ComponentLink1Description=https://datasheet.ciiva.com/26858/getdatasheetpartid-251124-26858392.pdf?src-supplier=Verical, ComponentLink1URL=https://datasheet.ciiva.com/26858/getdatasheetpartid-251124-26858392.pdf?src-supplier=Verical, ComponentLink2Description=https://datasheet.ciiva.com/5707/87246-5707962.pdf?src-supplier=Farnell, ComponentLink2URL=https://datasheet.ciiva.com/5707/87246-5707962.pdf?src-supplier=Farnell, ComponentLink3Description=https://datasheet.ciiva.com/16295/bus-elx-ds-4315-dr-series-16295562.pdf?src-supplier=Future+Electronics, ComponentLink3URL=https://datasheet.ciiva.com/16295/bus-elx-ds-4315-dr-series-16295562.pdf?src-supplier=Future+Electronics, ComponentLink4Description=https://datasheet.ciiva.com/30081/4a32919a-7470-4ae0-be45-b59e3a1351ef-30081146.pdf?src-supplier=Onlinecomponents.com, ComponentLink4URL=https://datasheet.ciiva.com/30081/4a32919a-7470-4ae0-be45-b59e3a1351ef-30081146.pdf?src-supplier=Onlinecomponents.com, Composition=Wirewound, Core Material=Ferrite, Depth=12.5mm, Height=6mm, Height - Seated (Max)=0.236inch, Length=12.5mm, Manufacturer Part Number 1=DR125-3R3-R, Max DC Current=9.26A, Military Standard=Not, Mount="Surface Mount", Number of Pins=2, Packaging="Tape and Reel", Pricing 1="1=2.03000, 10=1.87300, 100=1.31130 (USD)", Radiation Hardening=No, REACH SVHC="No SVHC", RMS Current (Irms)=9.26A, RoHS=Yes, Shielding=Shielded, Stock 1=1790, Supplier 1=Digi-Key, Termination=SMD/SMT, Test Frequency=100kHz, Tolerance=20%, Width=0.492inch
L2: library part DR125-2R2-R, "FIXED IND 2.2UH 10.9A 4.5 MOHM", Case/Package=Nonstandard, Current Rating=10.9A, DC Resistance (DCR)=4.5mR, Inductance=2.2uH, Inductance Tolerance=20%, Manufacturer 1="Eaton Cooper", Max Operating Temperature=125°C, Min Operating Temperature=-40°C, Package Quantity=600, Saturation Current=15A, Self Resonant Frequency=100kHz, Supplier Part Number 1=513-1662-1-ND, ComponentLink1Description=https://datasheet.ciiva.com/14667/0900766b8116a153-14667792.pdf?src-supplier=RSComponents, ComponentLink1URL=https://datasheet.ciiva.com/14667/0900766b8116a153-14667792.pdf?src-supplier=RSComponents, ComponentLink2Description=https://datasheet.ciiva.com/26926/getdatasheetpartid-571249-26926912.pdf?src-supplier=Verical, ComponentLink2URL=https://datasheet.ciiva.com/26926/getdatasheetpartid-571249-26926912.pdf?src-supplier=Verical, ComponentLink3Description=https://datasheet.ciiva.com/8004/87246-8004874.pdf?src-supplier=Element14, ComponentLink3URL=https://datasheet.ciiva.com/8004/87246-8004874.pdf?src-supplier=Element14, Composition=Wirewound, Core Material=Ferrite, DC Current=10.9A, Depth=12.5mm, Height=6mm, Height - Seated (Max)=0.236inch, Lead Free="Lead Free", Length=12.5mm, Manufacturer Part Number 1=DR125-2R2-R, Max DC Current=10.9A, Military Standard=Not, Mount="Surface Mount", Number of Pins=2, Packaging="Tape and Reel", Pricing 1="1=2.03000, 10=1.87300, 100=1.31130 (USD)", Radiation Hardening=No, REACH SVHC="No SVHC", RMS Current (Irms)=10.9A, RoHS=Yes, Shielding=Shielded, Stock 1=820, Supplier 1=Digi-Key, Termination=SMD/SMT, Test Frequency=100kHz, Tolerance=20%, Weight=0.144oz, Width=0.492inch
Q1 Q2: "MOSFET 2N-CH 30V 5.8A 8-SOIC", Case/Package=SO, Continuous Drain Current (ID)=8.2A, Drain to Source Resistance=11.5mR, Drain to Source Voltage (Vdss)=30V, Gate to Source Voltage (Vgs)=20V, Manufacturer 1="Vishay Siliconix", Max Operating Temperature=150°C, Max Power Dissipation=1.25W, Min Operating Temperature=-55°C, On-State Resistance=18.5mR, Package Quantity=1, Supplier Part Number 1=SI4816BDY-T1-E3CT-ND, Threshold Voltage=1V, ComponentLink1Description=https://datasheet.ciiva.com/7710/si4816bd-7710449.pdf?src-supplier=Element14, ComponentLink1URL=https://datasheet.ciiva.com/7710/si4816bd-7710449.pdf?src-supplier=Element14, ComponentLink2Description=https://datasheet.ciiva.com/15137/getdatasheetpartid-99188-15137841.pdf?src-supplier=Verical, ComponentLink2URL=https://datasheet.ciiva.com/15137/getdatasheetpartid-99188-15137841.pdf?src-supplier=Verical, ComponentLink3Description=https://datasheet.ciiva.com/26789/si4816bdy-t1-e3-26789112.pdf?src-supplier=IIIC, ComponentLink3URL=https://datasheet.ciiva.com/26789/si4816bdy-t1-e3-26789112.pdf?src-supplier=IIIC, ComponentLink4Description=https://datasheet.ciiva.com/18448/70026226-18448822.pdf?src-supplier=Allied+Electronics, ComponentLink4URL=https://datasheet.ciiva.com/18448/70026226-18448822.pdf?src-supplier=Allied+Electronics, ComponentLink5Description=https://datasheet.ciiva.com/16486/si4816bd-16486349.pdf?src-supplier=Future+Electronics, ComponentLink5URL=https://datasheet.ciiva.com/16486/si4816bd-16486349.pdf?src-supplier=Future+Electronics, ComponentLink6Description=https://datasheet.ciiva.com/26136/si4816bd-26136990.pdf?src-supplier=Avnet+Europe, ComponentLink6URL=https://datasheet.ciiva.com/26136/si4816bd-26136990.pdf?src-supplier=Avnet+Europe, ComponentLink7Description=https://datasheet.ciiva.com/11161/si4816bd-11161496.pdf?src-supplier=Avnet, ComponentLink7URL=https://datasheet.ciiva.com/11161/si4816bd-11161496.pdf?src-supplier=Avnet, ComponentLink8Description=https://datasheet.ciiva.com/928/si4816bd-928458.pdf?src-supplier=Digi-Key, ComponentLink8URL=https://datasheet.ciiva.com/928/si4816bd-928458.pdf?src-supplier=Digi-Key, ComponentLink9Description=https://datasheet.ciiva.com/928/si4816bd-928459.pdf?src-supplier=Digi-Key, ComponentLink9URL=https://datasheet.ciiva.com/928/si4816bd-928459.pdf?src-supplier=Digi-Key, ComponentLink10Description=https://datasheet.ciiva.com/928/si4816bd-928460.pdf?src-supplier=Digi-Key, ComponentLink10URL=https://datasheet.ciiva.com/928/si4816bd-928460.pdf?src-supplier=Digi-Key, Element Configuration=Single, Fall Time=9ns, FET Type="2 N-Channel", Height=1.55mm, Lead Free="Lead Free", Length=5mm, Manufacturer Part Number 1=SI4816BDY-T1-E3, Mount="Surface Mount", Nominal Vgs=3V, Number of Channels=2, Number of Elements=2, Number of Pins=8, Packaging="Tape and Reel", Pricing 1="1=1.61000, 10=1.44700, 100=1.06450, 500=0.90074, 1000=0.76426 (USD)", Radiation Hardening=No, Rds On Max=18.5mR, REACH SVHC=Unknown, Rise Time=9ns, RoHS=Yes, Stock 1=3182, Supplier 1=Digi-Key, Turn-Off Delay Time=31ns, Turn-On Delay Time=13ns, Weight=0.006596oz, Width=4mm
R1 R3 R9 R16: library part AC0805JR-070RL, "Thick Film Resistors - SMD 1/8W 0.0ohm 5%", Case/Package=0805, Case Code (Metric)=2012, Manufacturer 1=Yageo, Max Operating Temperature=155°C, Max Power Dissipation=125mW, Min Operating Temperature=-55°C, Resistance=0mR, Supplier Part Number 1=YAG3755CT-ND, Temperature Coefficient=200ppm/°C, Tolerance=5%, Voltage Rating=150V, Case Code (Imperial)=0805, ComponentLink1Description=http://www.yageo.com/documents/recent/PYu-AC_51_RoHS_L_2.pdf?src-supplier=Mouser, ComponentLink1URL=http://www.yageo.com/documents/recent/PYu-AC_51_RoHS_L_2.pdf?src-supplier=Mouser, ComponentLink2Description=http://www.yageo.com/NewPortal/yageodocoutput?fileName=/pdf/R-Chip/PYu-AC_51_RoHS_L_6.pdf&src-supplier=Digi-Key, ComponentLink2URL=http://www.yageo.com/NewPortal/yageodocoutput?fileName=/pdf/R-Chip/PYu-AC_51_RoHS_L_6.pdf&src-supplier=Digi-Key, Composition="Thick Film", Features="Moisture Resistant,Automotive AEC-Q200", Height=0.024inch, Lead Free="Lead Free", Length=0.079inch, Manufacturer Part Number 1=AC0805JR-070RL, Number of Terminations=2, Packaging="Tape and Reel", Power Rating=125mW, Pricing 1="1=0.10000, 10=0.04500, 25=0.03280, 50=0.02500, 100=0.01840, 250=0.01400, 500=0.01120, 1000=0.00825 (USD)", RoHS=Yes, Stock 1=40206, Supplier 1=Digi-Key, Termination=SMD/SMT, Width=1.25mm
R2: library part AC0805FR-0710RL, "Thick Film Resistors - SMD 1/8W 10ohm 1% AEC-Q200", Case/Package=0805, Case Code (Metric)=2012, Manufacturer 1=Yageo, Max Operating Temperature=155°C, Max Power Dissipation=125mW, Min Operating Temperature=-55°C, Supplier Part Number 1=YAG3690CT-ND, Temperature Coefficient=200ppm/°C, Tolerance=1%, Voltage Rating=150V, Case Code (Imperial)=0805, ComponentLink1Description=http://www.mouser.com/ds/2/447/yageodocoutput-1111992.pdf?src-supplier=Mouser, ComponentLink1URL=http://www.mouser.com/ds/2/447/yageodocoutput-1111992.pdf?src-supplier=Mouser, ComponentLink2Description=http://components.arrow.com/part/dataview/0323_03350463?src-supplier=Arrow+Europe, ComponentLink2URL=http://components.arrow.com/part/dataview/0323_03350463?src-supplier=Arrow+Europe, ComponentLink3Description=http://www.yageo.com/NewPortal/yageodocoutput?fileName=/pdf/R-Chip/PYu-AC_51_RoHS_L_6.pdf&src-supplier=Digi-Key, ComponentLink3URL=http://www.yageo.com/NewPortal/yageodocoutput?fileName=/pdf/R-Chip/PYu-AC_51_RoHS_L_6.pdf&src-supplier=Digi-Key, ComponentLink4Description=http://www.yageo.com/documents/recent/PYu-AC_51_RoHS_L_2_revised.pdf?src-supplier=Future+Electronics, ComponentLink4URL=http://www.yageo.com/documents/recent/PYu-AC_51_RoHS_L_2_revised.pdf?src-supplier=Future+Electronics, Composition="Thick Film", Depth=1.25mm, Features="Moisture Resistant,Automotive AEC-Q200", Height=0.024inch, Lead Free="Lead Free", Length=2mm, Manufacturer Part Number 1=AC0805FR-0710RL, Military Standard=Not, Number of Terminations=2, Packaging="Tape and Reel", Power Rating=125mW, Pricing 1="1=0.10000, 10=0.08600, 100=0.03330, 1000=0.01463, 2500=0.01264 (USD)", Resistance=10R, RoHS=Yes, Stock 1=526844, Supplier 1=Digi-Key, Termination=SMD/SMT, Width=1.25mm
R4 R5: library part AC0805FR-071RL, "AC Series 0805 0.125 W 1 Ohm ±1% ±200 ppm/°C SMT Thick Film Chip Resistor", Case/Package=0805, Case Code (Metric)=2012, Manufacturer 1=Yageo, Max Operating Temperature=155°C, Max Power Dissipation=125mW, Min Operating Temperature=-55°C, Supplier Part Number 1=YAG3705CT-ND, Temperature Coefficient=200ppm/°C, Tolerance=1%, Voltage Rating=150V, Case Code (Imperial)=0805, ComponentLink1Description=https://datasheet.ciiva.com/12576/pyu-ac-51-rohs-l-2-12576553.pdf?src-supplier=Mouser, ComponentLink1URL=https://datasheet.ciiva.com/12576/pyu-ac-51-rohs-l-2-12576553.pdf?src-supplier=Mouser, Composition="Thick Film", Features="Moisture Resistant,Automotive AEC-Q200", Height=0.024inch, Lead Free="Lead Free", Length=0.079inch, Manufacturer Part Number 1=AC0805FR-071RL, Number of Terminations=2, Packaging="Tape and Reel", Power Rating=125mW, Pricing 1="1=0.10000, 10=0.08600, 100=0.03330, 1000=0.01463, 2500=0.01264 (USD)", Resistance=1R, RoHS=Yes, Stock 1=22203, Supplier 1=Digi-Key, Termination=SMD/SMT, Weight=0.000194oz, Width=0.049inch
R6 R7 R11 R12: library part AC0805FR-07200KL, "Thick Film Resistors - SMD 1/8W 200K ohm 1% AEC-Q200", Case/Package=0805, Case Code (Metric)=2012, Manufacturer 1=Yageo, Max Operating Temperature=155°C, Max Power Dissipation=125mW, Min Operating Temperature=-55°C, Resistance=200kR, Supplier Part Number 1=YAG3706CT-ND, Temperature Coefficient=100ppm/°C, Tolerance=1%, Voltage Rating=150V, Case Code (Imperial)=0805, ComponentLink1Description=http://www.mouser.com/ds/2/447/yageodocoutput-1111992.pdf?src-supplier=Mouser, ComponentLink1URL=http://www.mouser.com/ds/2/447/yageodocoutput-1111992.pdf?src-supplier=Mouser, ComponentLink2Description=http://www.yageo.com/NewPortal/yageodocoutput?fileName=/pdf/R-Chip/PYu-AC_51_RoHS_L_6.pdf&src-supplier=Digi-Key, ComponentLink2URL=http://www.yageo.com/NewPortal/yageodocoutput?fileName=/pdf/R-Chip/PYu-AC_51_RoHS_L_6.pdf&src-supplier=Digi-Key, ComponentLink3Description=http://www.yageo.com/documents/recent/PYu-AC_51_RoHS_L_2.pdf?src-supplier=Future+Electronics, ComponentLink3URL=http://www.yageo.com/documents/recent/PYu-AC_51_RoHS_L_2.pdf?src-supplier=Future+Electronics, Composition="Thick Film", Features="Moisture Resistant,Automotive AEC-Q200", Height=0.024inch, Lead Free="Lead Free", Length=0.079inch, Manufacturer Part Number 1=AC0805FR-07200KL, Number of Terminations=2, Packaging="Tape and Reel", Power Rating=125mW, Pricing 1="1=0.10000, 10=0.04800, 100=0.01970, 1000=0.00885, 2500=0.00768 (USD)", RoHS=Yes, Stock 1=918, Supplier 1=Digi-Key, Termination=SMD/SMT, Width=0.049inch
R8 R13 R15 R17 R18: library part RES
R10 R14: library part AC0805FR-0710KL, "RES SMD 10K OHM 1% 1/8W 0805", Case/Package=0805, Case Code (Metric)=2012, Manufacturer 1=Yageo, Max Operating Temperature=155°C, Max Power Dissipation=125mW, Min Operating Temperature=-55°C, Package Quantity=1, Resistance=10kR, Supplier Part Number 1=311-10KLGCT-ND, Temperature Coefficient=100ppm/°C, Tolerance=1%, Voltage Rating=150V, Case Code (Imperial)=0805, ComponentLink1Description=https://datasheet.ciiva.com/5558/pyu-ac-51-rohs-l-2-5558347.pdf?src-supplier=Mouser, ComponentLink1URL=https://datasheet.ciiva.com/5558/pyu-ac-51-rohs-l-2-5558347.pdf?src-supplier=Mouser, Composition="Thick Film", Depth=1.25mm, Features="Moisture Resistant,Automotive AEC-Q200,Anti-Sulfur", Height=0.024inch, Lead Free="Lead Free", Length=0.079inch, Manufacturer Part Number 1=AC0805FR-0710KL, Military Standard=Not, Number of Terminations=2, Packaging="Tape and Reel", Power Rating=125mW, Pricing 1="1=0.10000, 10=0.04800, 100=0.01970, 1000=0.00885, 2500=0.00768 (USD)", RoHS=Yes, Stock 1=626880, Supplier 1=Digi-Key, Termination=SMD/SMT, Width=0.049inch
U1: "IC MAIN PWR CTRLR QUAD 32-QFN", Case/Package=QFN, Manufacturer 1=Intersil, Max Operating Temperature=100°C, Min Operating Temperature=-40°C, Output Current=20A, Package Quantity=60, Supplier Part Number 1=ISL6236AIRZ-ND, Switching Frequency=500kHz, ComponentLink1Description=https://datasheet.ciiva.com/25905/fn6453-25905351.pdf?src-supplier=Avnet+Europe, ComponentLink1URL=https://datasheet.ciiva.com/25905/fn6453-25905351.pdf?src-supplier=Avnet+Europe, Height=0.95mm, Lead Free="Lead Free", Length=5mm, Manufacturer Part Number 1=ISL6236AIRZ, Mount="Surface Mount", Number of Outputs=2, Packaging=Rail/Tube, Pricing 1="600=3.818000 (USD)", Radiation Hardening=No, RoHS=Yes, Stock 1=0, Supplier 1=Digi-Key, Width=5mm

## Via types
v1: diameter 0.6, hole 0.3, L1 to L6, tented both sides, 95 vias

## Nets (pads, with @x,y where several pads share a name; then routed paths per layer and width w, separated by ;. In a path a pad name is that pad's centre, name@x,y a point inside that pad or via, vN(x,y) a via of type N, cw(c..) or ccw(c..) an arc to the next point about the centre after c; other vN are vias at no path point)
+1V5: C9.1 J3.1 L1.1 R8.2 U1.10 | length 14
  L3 w1: v1(31.1,20) 32.286,20 36.286,16 v1(37.3,16)
  L6 w0.2: 26.265,22.029 U1.10@26.265,22.585
  L6 w0.5: 26.265,22.029 27.394,20.9 29.15,20.9 R8.2@29.975,20.075 ; R8.2 30.15,20 v1(31.1,20)
+1V05: C10.1 J4.1 L2.2 U1.30 | length 16.3
  L3 w1: 26.2,29 33.414,29 34,29.586 34,29.914 37.886,33.8 v1(38.7,33.8)
  L6 w0.2: U1.30 25.765,27.415 25.765,28.865 v1(25.9,29)
+5V_LDO: C1.1 R1.2 U1.7 | length 24.9
  L3 w1: v1(12.9,23.9) 15.1,21.7 24.086,21.7 24.286,21.9 25.514,21.9 27.014,23.4 29.8,23.4 v1(29.9,23.5)
  L6 w0.2: U1.7 28.15,23.75 28.6,23.3
  L6 w0.3: v1(12.9,23.9) R1.2
  L6 w0.5: 28.6,23.3 28.6,22.55 28.95,22.2 C1.1 29.9,22.25 v1(29.9,23.5)
+5V_PVCC: C3.2 R1.1 R2.1 R3.2 U1.19 | length 14.1
  L6 w0.2: 21.3,24.265 U1.19@22.585,24.265
  L6 w0.7: R2.1 R3.2 R1.1 17.066,23.9 17.083,23.883 17.1,23.9 17.1,25.283 17.417,25.6 20.1,25.6 20.25,25.45 C3.2 20.25,24.365 20.35,24.265 21.3,24.265
+5V_VCC: C4.2 R2.2 R9.2 R10.2 R11.2 R12.2 R14.2 R17.1 U1.2 U1.3 U1.20 | length 19.2
  L6 w0.2: v1(21.339,25.3) 21.348,25.3 21.898,24.75 22.261,24.75 ; 22.261,24.751 U1.20@22.599,24.751 ; U1.3 27.415,25.765 27.865,25.765 29.2,27.1 29.2,29.45 ; U1.2@27.415,26.235 U1.2 27.415,26.265 27.831,26.265 28.2,26.634 v1(28.2,27.1) ; R10.2@29.95,35.1 R10.2 ; C4.2 30.1,29.85 C4.2@30.2,29.95
  L6 w0.5: v1(12.9,28.8) R2.2 ; v1(12.9,31.2) R12.2 ; v1(12.9,33.6) R11.2 ; v1(22.7,16.3) R14.2 ; R17.1 v1(28.5,38.5) ; v1(27.4,16.3) R9.2 ; 29.2,29.45 29.95,29.45 30.15,29.65 C4.2 ; v1(29.2,35.1) R10.2@29.95,35.1 ; C4.2@30.2,29.95 v1(30.2,31.2)
+REF: C12.1 R15.1 U1.1 | length 10.4
  L6 w0.2: U1.1 27.4,27.1
  L6 w0.5: R15.1 27.35,34 29.05,34 30.05,33 C12.1 30.05,32.6 28.4,30.95 28.4,28.51 27.4,27.51 27.4,27.305
+VIN: C2.2 C5.2 C6.1 J1.1 Q1.8 Q2.8 R3.1 U1.6 | length 5.6
  L6 w0.2: R3.1 R3.1@14.35,26.3 ; U1.6@27.415,24.235 27.917,24.235 ; 27.937,24.215 29.515,24.215
  L6 w0.5: R3.1@14.35,26.3 v1(14.35,27.25) ; 29.515,24.215 29.9,24.6 30.3,24.6 C2.2 30.4,24.9 31,25.5 v1(31,25.8)
+VREF3: C11.1 R16.2 U1.5 | length 22.8
  L6 w0.2: U1.5@27.415,24.765 28.165,24.765
  L6 w0.5: R16.2 27.25,36.3 27.35,36.4 32.386,36.4 34.55,34.236 34.55,29.35 33.4,28.2 31.4,28.2 31.1,27.9 31.1,27.35 30.95,27.2 C11.1 30.95,26.8 30.75,26.6 30.564,26.6 28.729,24.765 28.165,24.765
EN1: R14.1 U1.14 | length 3.9
  L6 w0.2: R14.1 22.7,19.749 22.751,19.8 23.149,19.8 23.8,20.451 23.8,20.849 24.25,21.299 U1.14
EN_LDO: R10.1 U1.4 | length 14.7
  L6 w0.2: U1.4 27.415,25.265 27.887,25.265 27.987,25.365 28.331,25.365 29.7,26.734 29.7,27.5 31.05,28.85 32.85,28.85 33.6,29.6 33.6,33.4 32,35 R10.1@32,35.2
FB1: R8.1 R9.1 R13.2 U1.11 | length 9.6
  L6 w0.2: 25.75,21.55 25.75,21.766 25.715,21.801 25.715,22.256 25.75,22.291 U1.11
  L6 w0.5: 25.75,21.55 26.85,20.45 26.85,19.8 27.1,19.55 R9.1 28.9,18.05 R8.1 R13.2
GND: C1.2 C2.1 C3.1 C4.1 C5.1 C6.2 C9.2 C10.2 C11.2 C12.2 J2.1 J5.1 J6.1 Q1.2 Q1.3 Q2.2 Q2.3 R6.1 R7.2 R13.1 R18.2 U1.8 U1.21 U1.22 U1.29 U1.33 | length 18.5
  L6 w0.2: C3.1@18.35,23.85 C3.1 ; U1.21 U1.33@24.75,25.25 ; U1.22 24.25,25.75 U1.33@24.75,25.25 ; U1.33 U1.33@24.75,25.25 ; v1(25.025,29.075) 25.025,28.967 25.25,28.742 U1.29 ; U1.8 27.585,23.25 27.8,23.035 v1(27.8,22.4) ; C4.1 32,29.85 C4.1@32.1,29.95 ; C2.1 v1(33.65,24.7) ; C11.2 v1(34.2,27) ; C1.2 v1(34.3,22.2)
  L6 w0.5: v1(24.95,31.85) R7.2 ; v1(25.1,16.3) R6.1 ; R18.2 v1(28.6,40.8) ; R13.1 v1(33.75,19.95) ; 32.5,30 v1(33,30)
  other v1: 9.5,9 11,9 12,9 9.5,10.5 11,10.5 12,10.5 9.5,12 11,12 12,12 9.5,13.5 9.5,14.5 9.5,15.5 38.5,18 13.5,19 36.5,19 40.5,19 13.5,20 36.5,20.5 40.5,20.5 13.5,21.5 38.5,21.5 18.1,23.7 18.9,23.7 23.9,23.7 25.9,23.7 25.9,26.1 23.9,26.2 38.5,28.5 36.5,29.5 40.5,29.5 36.5,31 40.5,31 26.5,31.5 31.5,31.8 32.4,31.8 38.5,32 8.5,33 10,33 11,33 8.5,34.5 10,34.5 11,34.5 8.5,36 10,36 11,36 8.5,37.5 8.5,38.5 10,38.5 8.5,39.5 10,39.5 14.5,43.5 13,44 13.123,45.205
LGATE1: Q1.4 U1.18 | length 27.3
  L1 w0.5: Q1.4@12.173,13.095 v1@13.495,13.095
  L3 w1: v1(13.5,13.09) 13.5,14.2 10.5,17.2 10.5,24.1 11.8,25.4 18.8,25.4 20.9,23.3 v1(21.533,23.3)
  L6 w0.2: v1(21.533,23.3) 21.565,23.3 22,23.735 22.585,23.735 U1.18 U1.18@22.585,23.765
LGATE2: Q2.4 U1.23 | length 19
  L1 w0.5: Q2.4@11.373,37.195 v1@12.695,37.195
  L3 w0.5: 14.1,31.9 14.1,36.083
  L3 w1: v1(12.7,37.19) 12.7,36 12.783,36.083 14.1,36.083 ; 14.1,31.9 18.8,27.2 20.5,27.2 v1(21.1,26.6)
  L6 w0.2: v1(21.1,26.6) 21.435,26.265 22.585,26.265 U1.23
NetC7_2: C7.2 R4.1 | length 2.4
  L6 w0.2: C7.2 18.45,19.95 R4.1
NetC8_1: C8.1 R5.2 | length 2.6
  L6 w0.2: C8.1 18.4,28.95 18.4,26.95 R5.2
NetR4_2: R4.2 U1.17 | length 2.7
  L6 w0.2: R4.2 21.265,22.1 22.415,23.25 U1.17
NetR5_1: R5.1 U1.24 | length 2.8
  L6 w0.2: R5.1 20.25,27.15 20.3,27.2 21.6,27.2 22.05,26.75 U1.24
NetR6_2: R6.2 U1.12 | length 3.3
  L6 w0.2: R6.2 25.4,19.85 25.4,21.049 25.2,21.249 25.2,22.55 U1.12
NetR7_1: R7.1 U1.31 | length 2.8
  L6 w0.2: R7.1@26.225,29.875 R7.1@26.3,29.8 ; U1.31 26.25,28.501 26.5,28.751 26.5,29.75 R7.1
PHASE1: C7.1 L1.2 Q1.5 Q1.6 Q1.7 U1.16 | length 12.2
  L1 w0.2: L1.2@22.23,13.095 L1.2
  L3 w0.5: v1(19.2,13.1) 19.2,17 v1(20.2,18)
  L6 w0.2: 22.7,22.6 U1.16
  L6 w0.5: v1(20.2,18) C7.1 20.2,20 20.7,20.5 21.722,20.5 22.7,21.478 22.7,22.6
PHASE2: C8.2 L2.1 Q2.5 Q2.6 Q2.7 U1.25 | length 12.8
  L3 w1: v1(18.5,37.2) 19.4,36.3 19.4,31 v1(19.9,30.5)
  L6 w0.2: 22.6,28 22.7,27.9 23.2,27.4 U1.25
  L6 w0.5: v1(19.9,30.5) 19.9,29.5 19.9,29.35 C8.2 20.15,29.5 20.9,29.5 22.7,27.9
POK1: R12.1 U1.13 U1.27 | length 33.1
  L3 w0.2: v1(22.862,30.087) 23.165,30.087 28.051,25.2 30.683,25.2 31.2,24.683 31.2,21.117 30.983,20.9 v1(24.7,20.9)
  L6 w0.2: R12.1 16.35,31.4 21.549,31.4 v1(22.862,30.087) 23.8,29.149 23.8,28.886 24.235,28.451 24.235,27.415 U1.27 ; v1(24.7,20.9) 24.735,20.935 24.735,22.585 U1.13
POK2: R11.1 U1.28 | length 13.7
  L6 w0.2: R11.1 22.9,33.6 24.2,32.3 24.2,29.051 24.75,28.501 U1.28
REFIN2: R15.2 R16.1 R17.2 R18.1 U1.32 | length 15.2
  L6 w0.2: U1.32 26.765,27.415 26.765,27.965 26.8,28
  L6 w0.5: R18.1 R17.2 R16.1 R15.2 25.35,33.6 26.15,32.8 26.986,32.8 27.6,32.186 27.6,29.074 26.8,28.274 26.8,28
UGATE1: Q1.1 U1.15 | length 14.7
  L1 w0.5: Q1.1@12.173,16.905 v1@13.495,16.905
  L3 w1: v1(13.5,16.9) 15,18.4 19.186,18.4 21.186,20.4 v1(22.9,20.4)
  L6 w0.2: v1(22.9,20.4) 22.9,20.9 23.75,21.75 U1.15
UGATE2: Q2.1 U1.26 | length 23.5
  L1 w0.5: Q2.1@11.316,41 v1(12.684,41) ; Q2.1@11.368,41 11.373,41.005 Q2.1@11.378,41
  L3 w1: v1@12.7,41 16,41 17.3,39.7 17.3,31.248 17.666,30.882 19.399,29.2 20.281,29.2 20.681,28.8 v1(23.2,28.8)
  L6 w0.2: v1(23.2,28.8) 23.75,28.25 U1.26
pads on no net: U1.9

## Polygon pours and split planes (outlines as drawn)
GND on L1 "L1-GND" (solid, pour order 76): 9.124,8.5 9.624,8 12.624,8 12.624,12.5 10.5,12.5 10.5,14 10.7,14 13.624,14 13.124,14 13.124,16 9.124,16
+VIN on L1 "L1-+VIN 1" (solid, pour order 66): 13.5,34
GND on L1 "L1-GND 1" (solid, pour order 64): 8,32.5 8.5,32 11.5,32 11.5,36.5 9.8,36.5 9.6,36.7 9.6,37.8 9.8,38 12.5,38 12,38 12,40.4 8.3,40.4 8,40.2
+VIN on L1 "L1-+VIN 2" (solid, pour order 56): 18.7,17.9
+VIN on L1 "L1-+VIN 3" (solid, pour order 54): 17.2,21.7 18.9,21.7 18.9,16.3 17.2,16.3
GND on L1 "L1-GND 2" (solid, pour order 48): 35.5,22 41.5,22 41.5,17.5 35.5,17.5
GND on L1 "L1-GND 3" (solid, pour order 46): 42.5,28
GND on L1 "L1-GND 4" (solid, pour order 44): 35.5,32.5 41.5,32.5 41.5,28 35.5,28
no net on L1 "L1-No Net" (solid, pour order 42): 13,21
GND on L1 "L1-GND 5" (solid, pour order 40): 13,22 15.5,22 15.5,18.5 13,18.5
no net on L1 "L1-No Net 1" (solid, pour order 38): 12.5,20
no net on L1 "L1-No Net 2" (solid, pour order 36): 13.5,21
no net on L1 "L1-No Net 3" (solid, pour order 34): 13,21
no net on L1 "L1-No Net 4" (solid, pour order 30): 12.5,20
no net on L1 "L1-No Net 5" (solid, pour order 28): 13.5,21
no net on L1 "L1-No Net 6" (solid, pour order 26): 13,45.5
no net on L1 "L1-No Net 7" (solid, pour order 24): 12,44.5
GND on L1 "L1-GND 6" (solid, pour order 22): 12.5,46.5 15,46.5 15,43 12.5,43
no net on L1 "L1-No Net 8" (solid, pour order 20): 15,43.5
no net on L1 "L1-No Net 9" (solid, pour order 18): 12.5,45.5
+VIN on L1 "L1-+VIN" (solid, pour order 16): 16,16.3 17.5,16.3 17.5,25 32,25 32,28.5 7.5,28.5 7.5,41 10.5,47 15.5,47 15.5,40.5 22.5,40.5 22.5,48 22.5,48.5 2,48.5 2,25 16,25
+1V5 on L1 "L1-+1V5" (solid, pour order 12): 30.1,16.2 30.1,9.5 47.8,9.5 47.8,16.2
+1V05 on L1 "L1-+1V05" (solid, pour order 8): 29.9,39.9 29.9,33.2 47.6,33.2 47.6,39.9
PHASE1 on L1 "L1-PHASE1" (solid, pour order 6): 16.4,16.1 24.5,16.1 24.5,9.8 19,9.8 16.4,12.4
PHASE2 on L1 "L1-PHASE2" (solid, pour order 4): 15.7,40.1 24.5,40.1 24.5,34.1 18.4,34.1 15.7,36.8
+VIN on L6 "L6-+VIN" (solid, pour order 58): 19,23.2
GND on L6 "L6-GND" (solid, pour order 52): 17.7,25.1 19.3,25.1 19.3,23.308 17.7,23.308
GND on L6 "L6-GND 1" (solid, pour order 50): 31.1,33.5 32.8,33.5 32.8,31.4 31.1,31.4
+5V_VCC on L4 "L4-+5V_VCC" (solid, pour order 78): 7.3,46 41.7,46 41.7,5 7.3,5
GND on L2 (split plane): 49.49,0.51 0.51,0.51 0.51,49.49 49.49,49.49
GND on L5 (split plane): 49.49,0.51 0.51,0.51 0.51,49.49 49.49,49.49

## Other copper
L1:
  text "Zakaria EL KHACHIN" at 3,4 h1.52
  text "SCH & PCB Course" at 3,2 h1.2

## Silkscreen, mask and mechanical layers (free items; w line width, h text height)
Top Overlay:
  text "OUT1" at 42.3,38.7 h1.52
  text "+VIN" at 2,32.6 h1.52
  text "GND" at 42.6,25.9 h1.52
  text "GND" at 42.7,22.5 h1.52
  text "GND" at 2.8,15.9 h1.52
  text "OUT2" at 42.2,9.9 h1.52
Bottom Overlay:
  text "ISL623A DEMO V1I1" at 41,47 h2
  text "1" at 28.9,26.4 h0.9
Top Solder:
  text "Zakaria EL KHACHIN" at 3,4 h1.52
  text "SCH & PCB Course" at 3,2 h1.2
Board outline:
  the board outline again, w0.5

## Text inside footprints (layer, text, board x,y; h text height)
Q1: Top Overlay "1" at 11.2,17.8 h0.9 r270
Q2: Top Overlay "1" at 10.4,41.9 h0.9 r270